# Altium PCB rtm-damp-dvb.PcbDoc (part 1 of 3)
Units mm, origin at the board's own origin, x right, y up, seen from the top; angles counter-clockwise.
Board outline 152.4 x 101.6 mm, 4 copper layers (Top Layer, GND, Vcc, Bottom Layer), stack 0.777 mm thick; 196 components, 95 nets, 559 pads, 90 vias.
Unrouted connection lines stored in the file: 129.
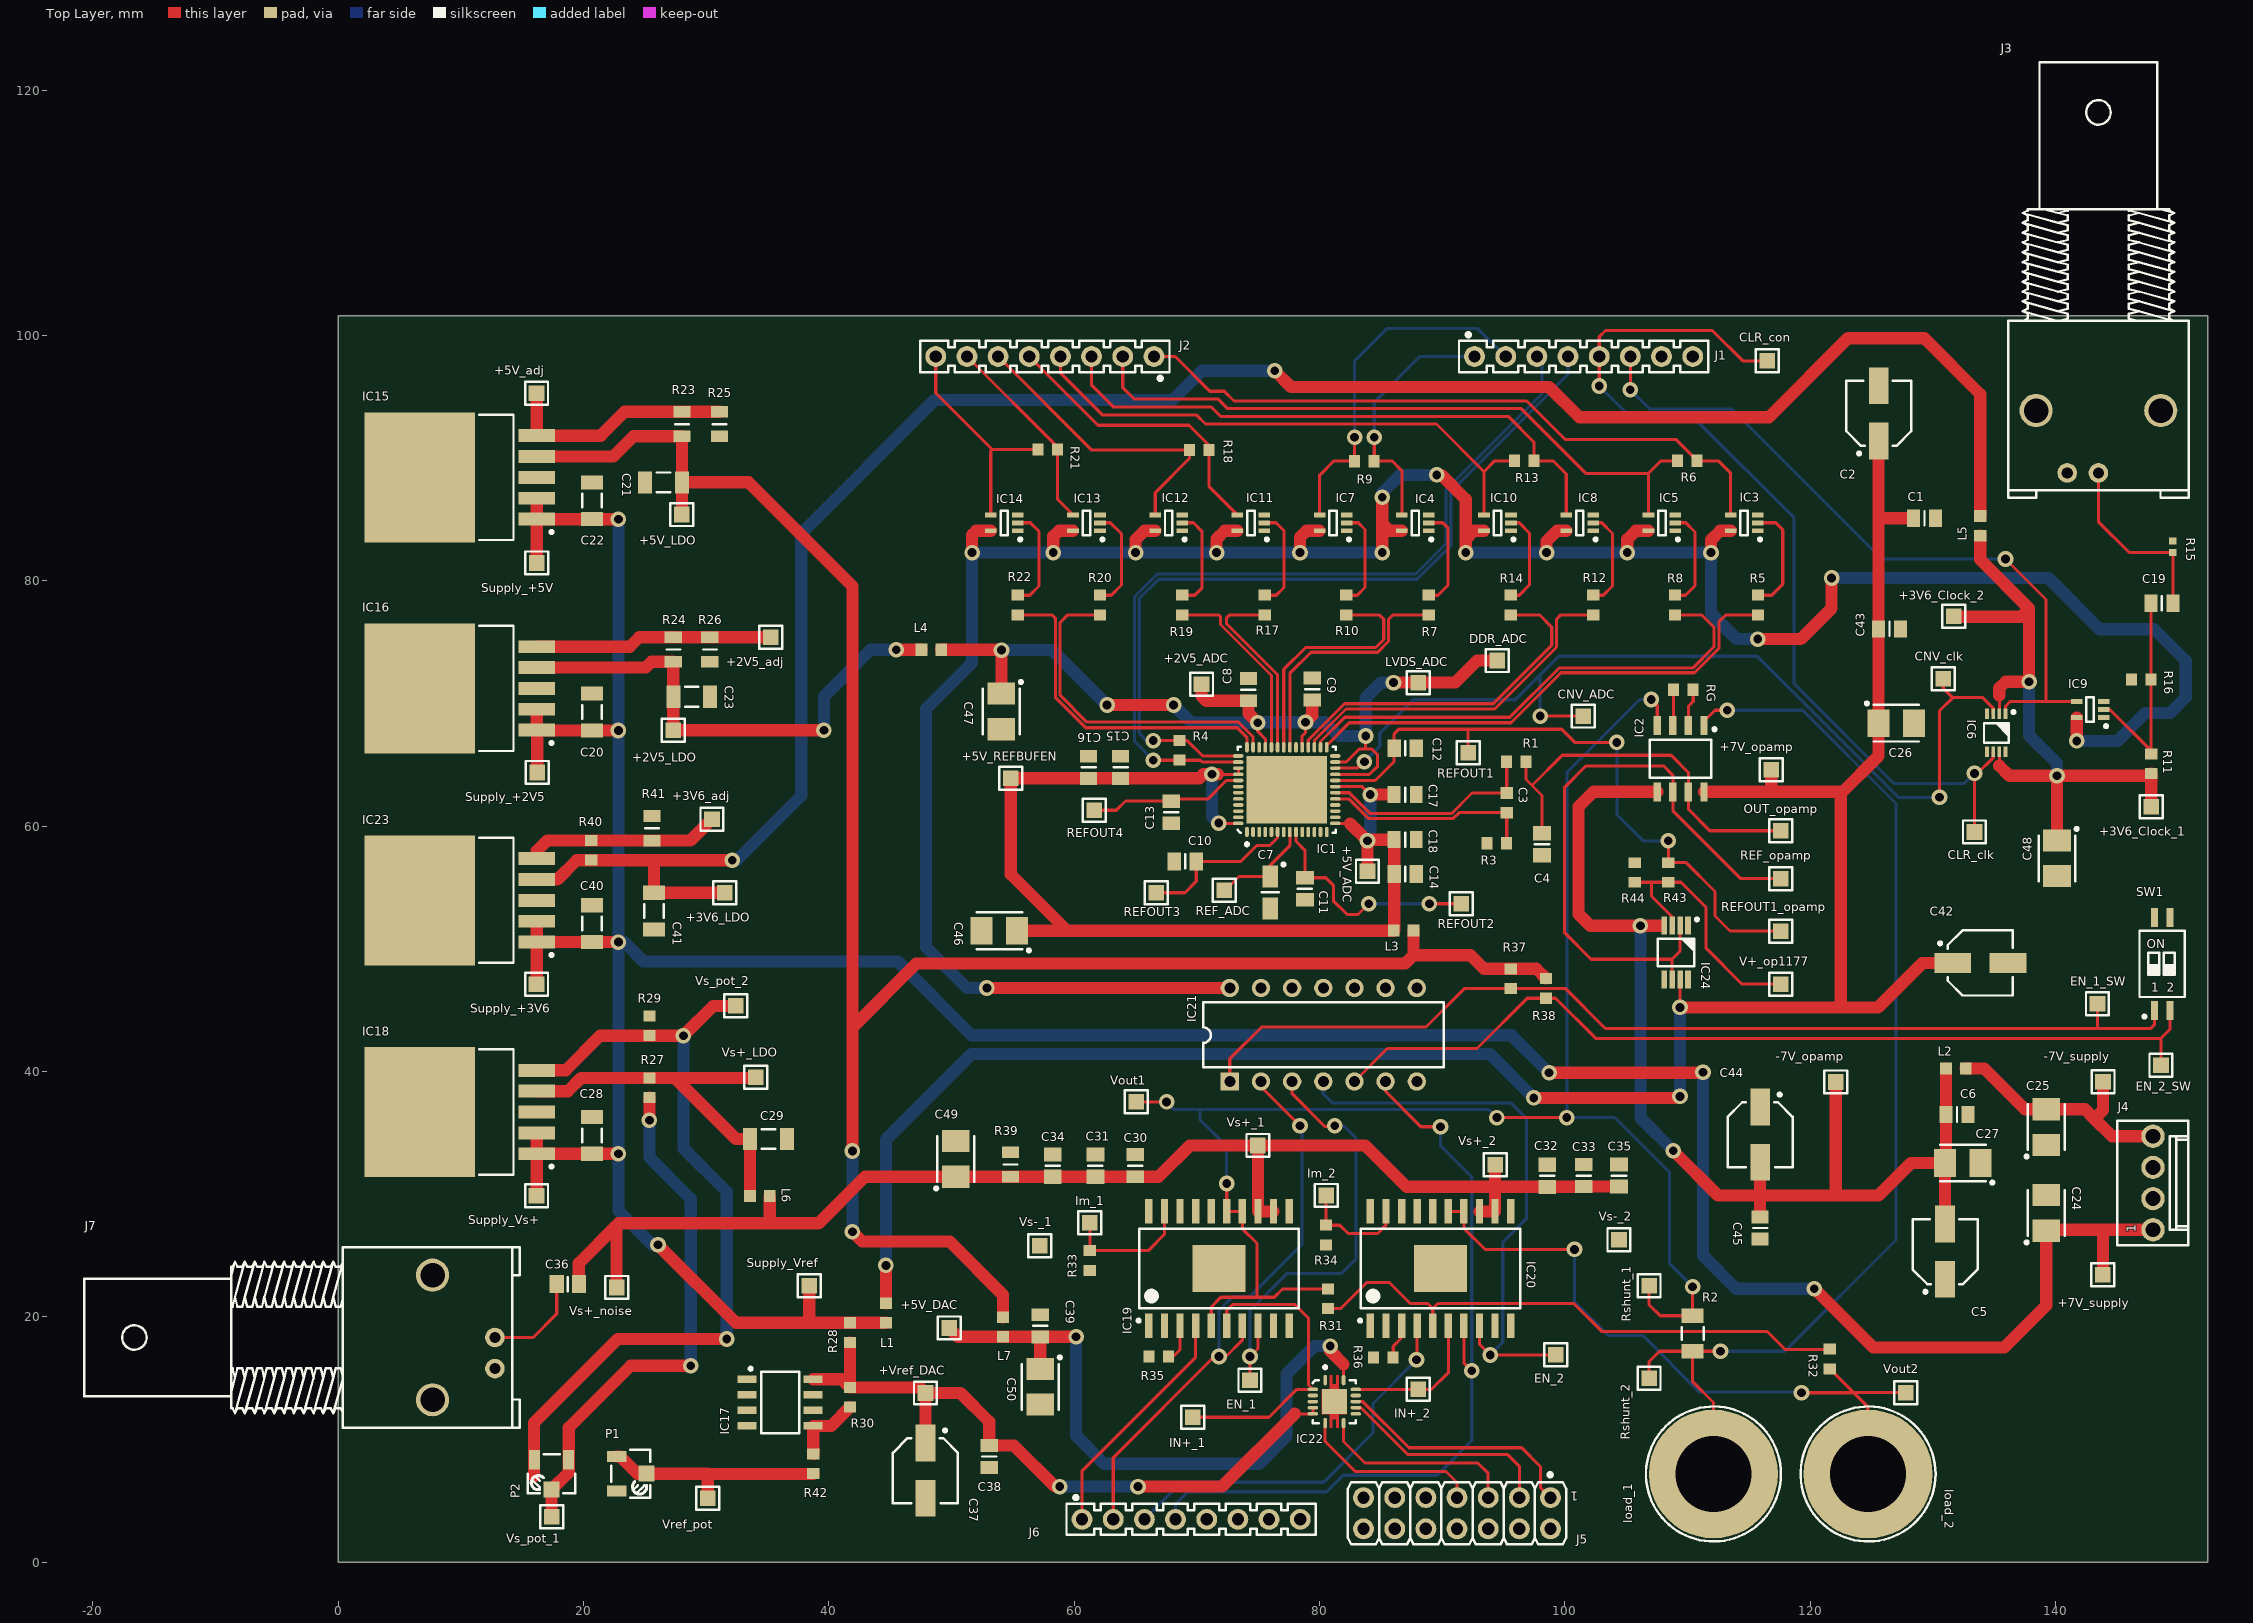
[diagram p0: Top Layer view]
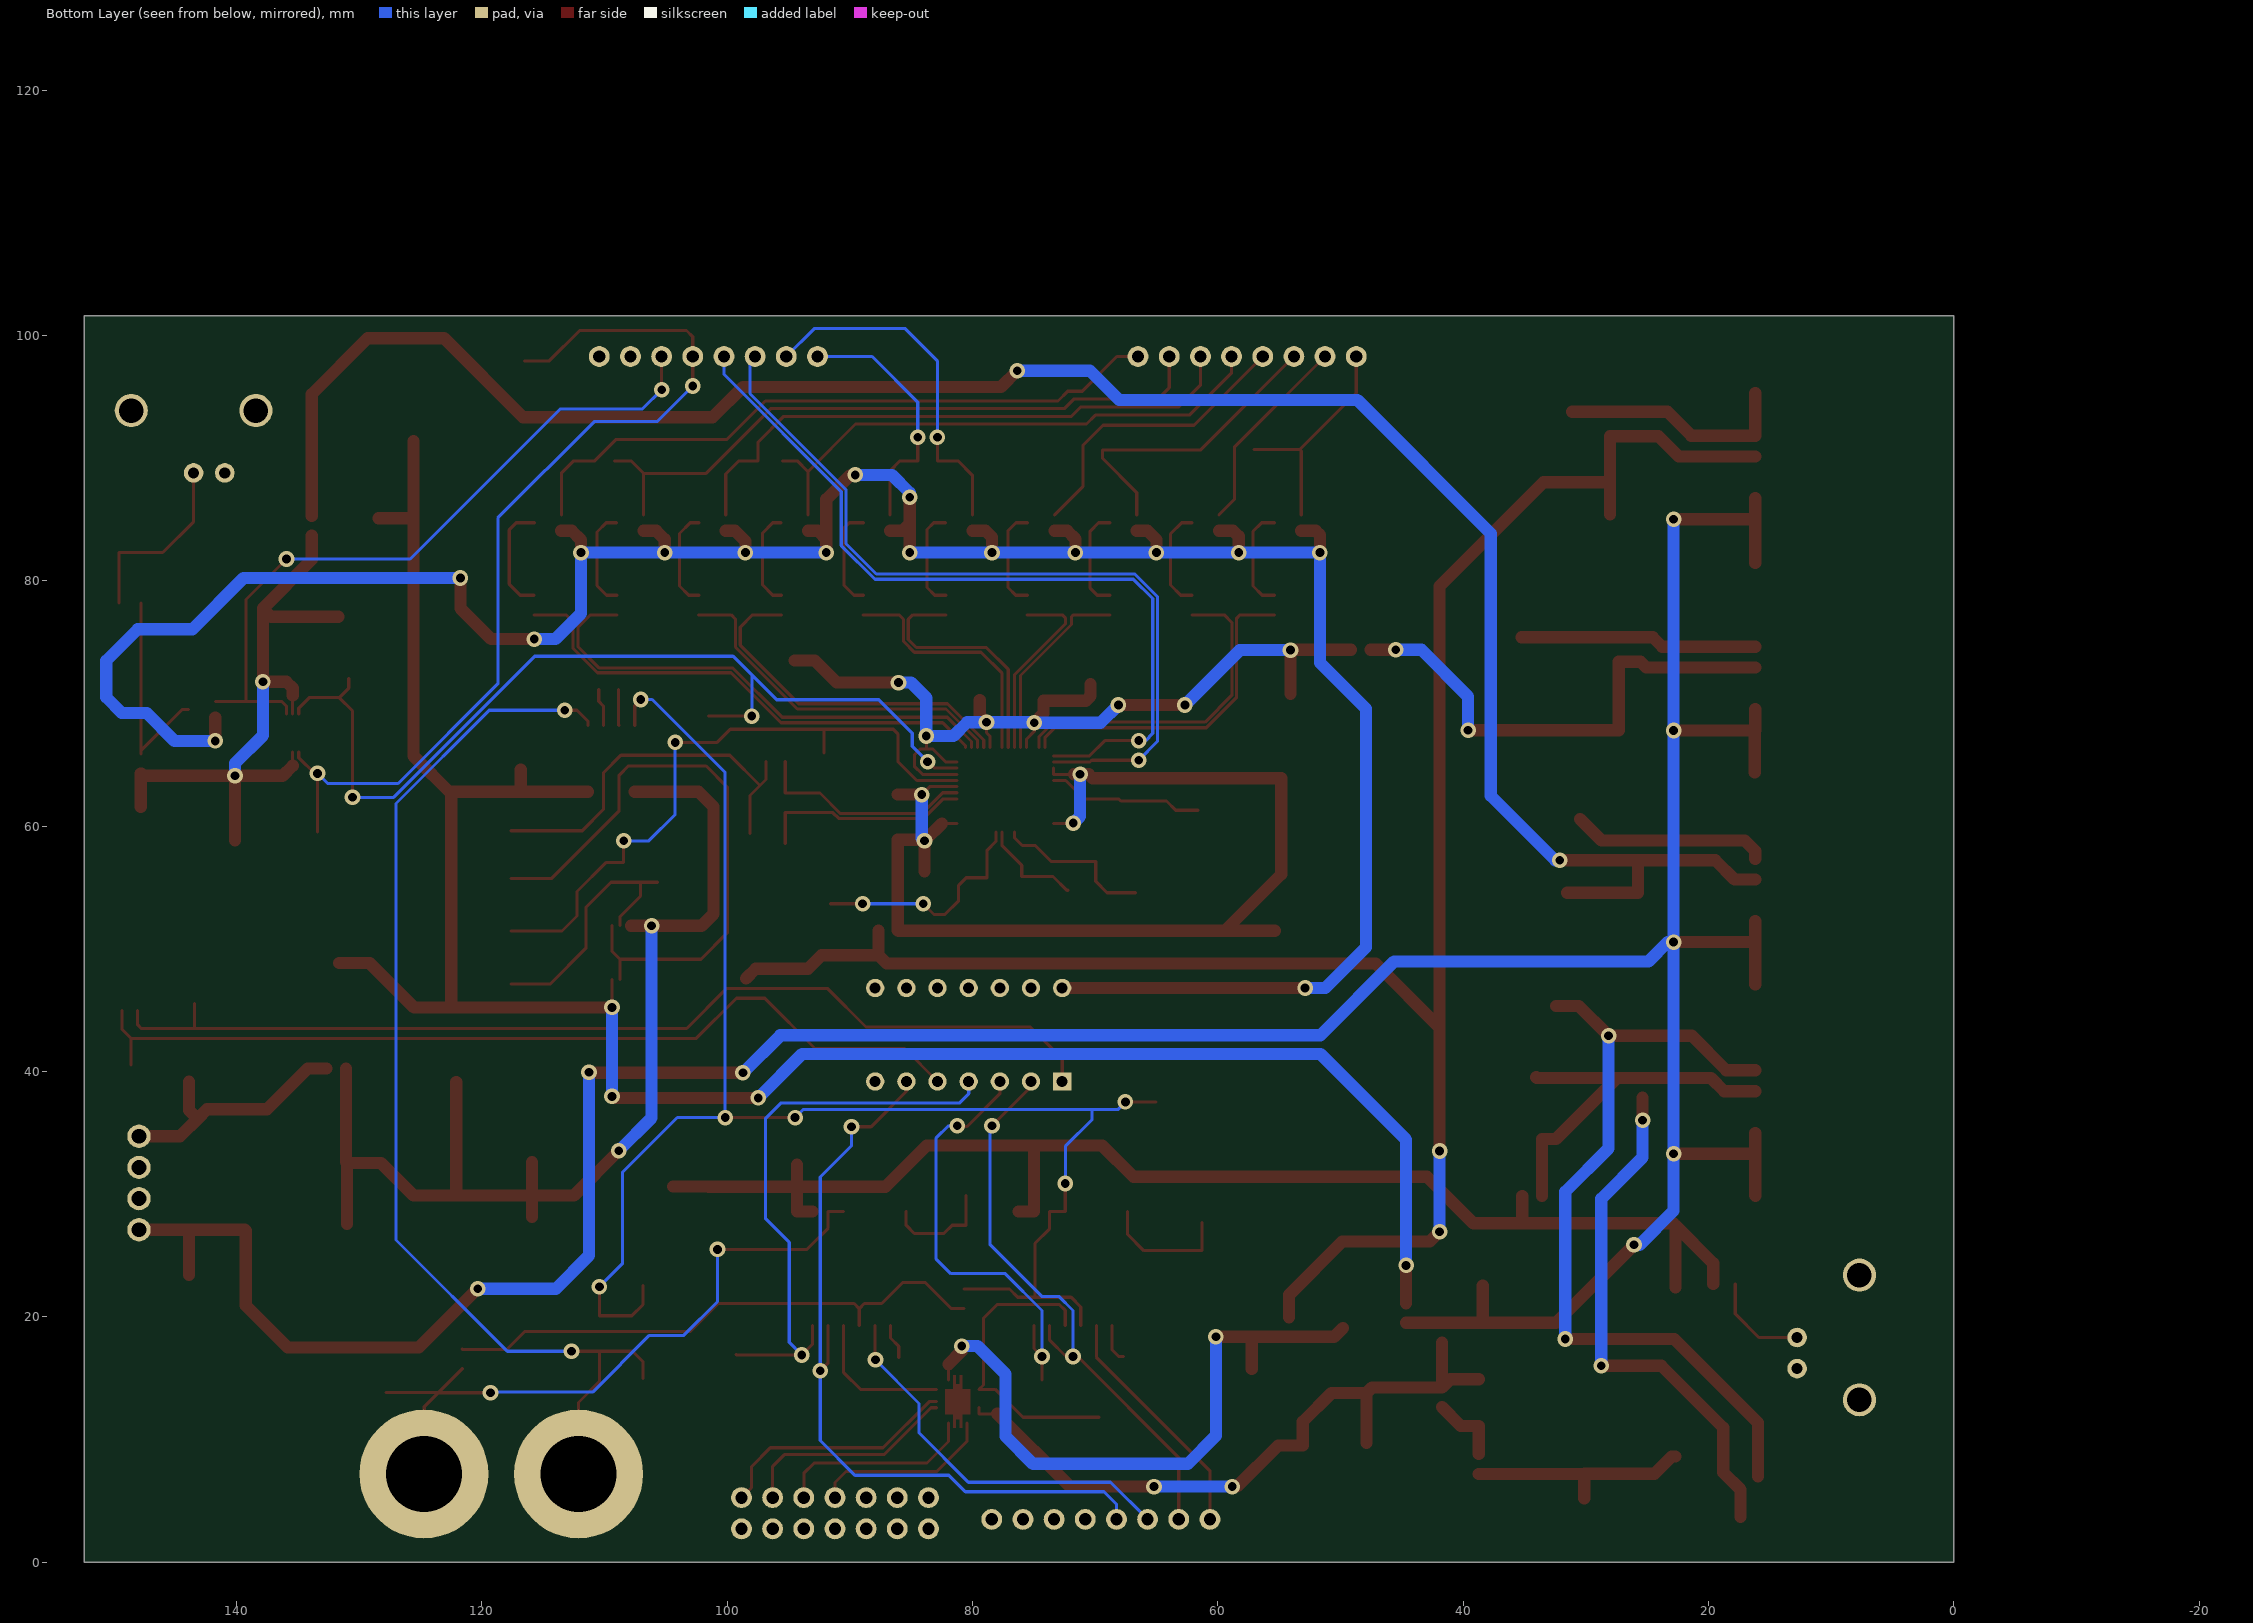
[diagram p1: Bottom Layer view, seen from below]
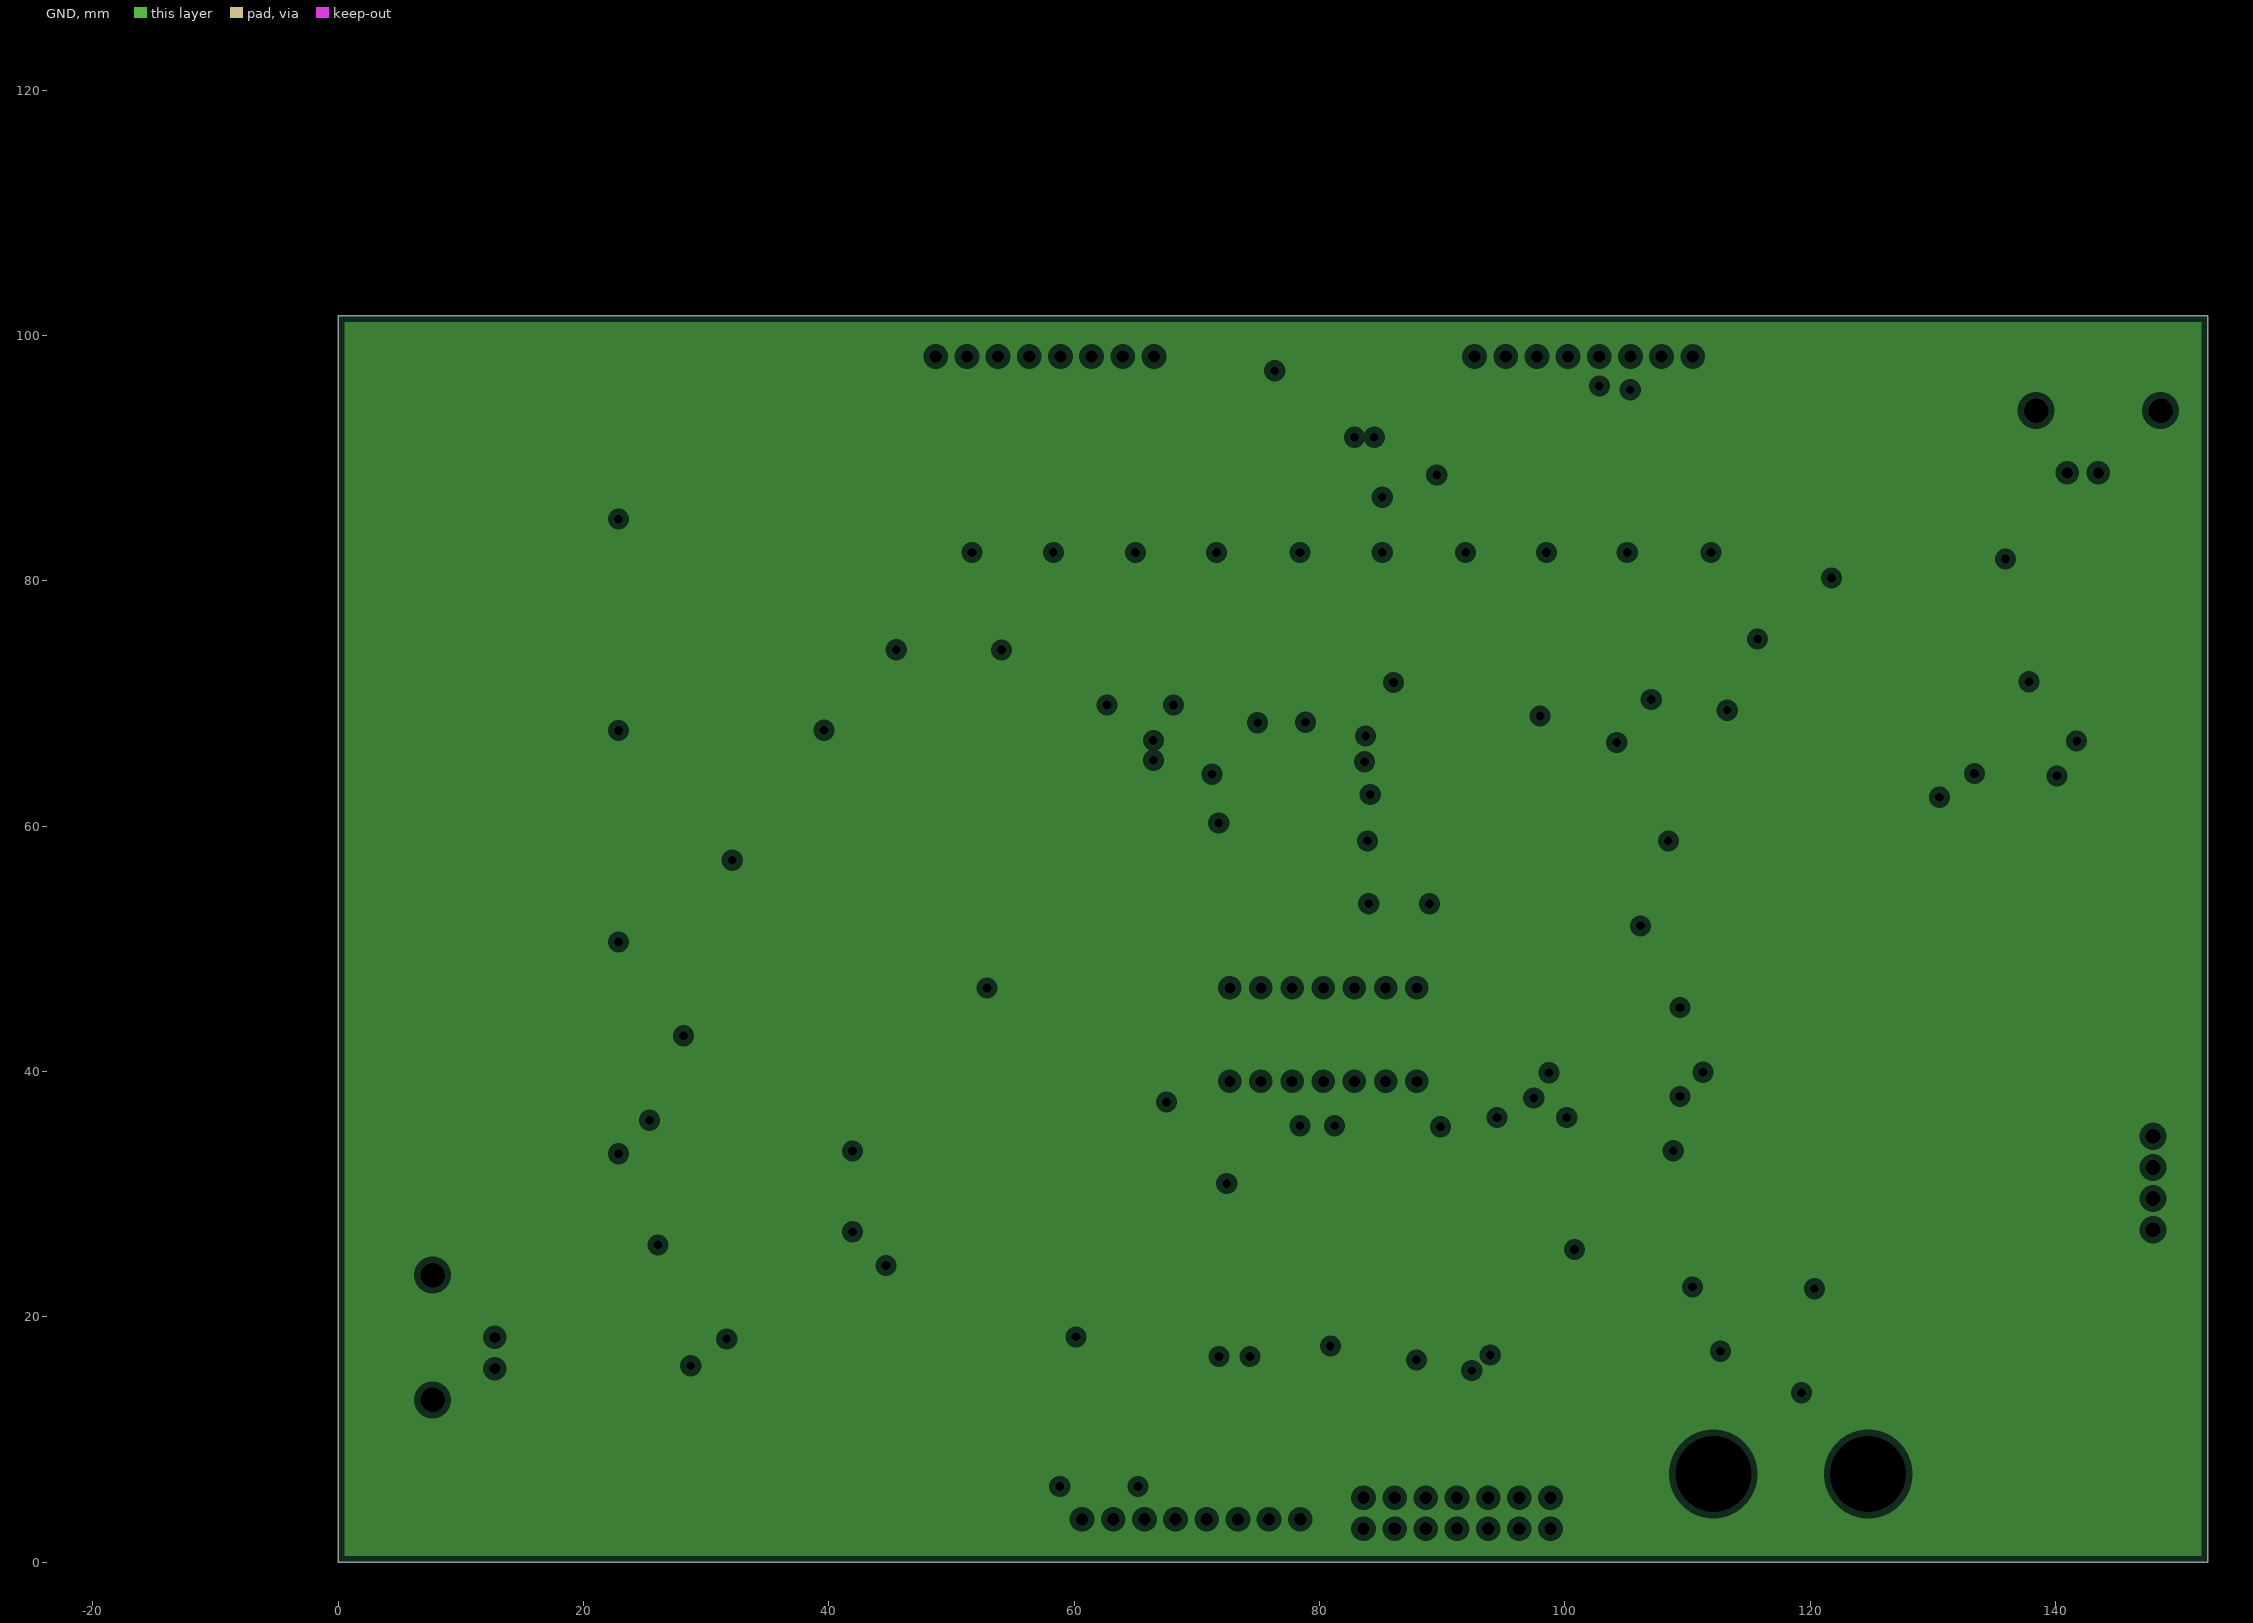
[diagram p2: GND, clearances drawn from the general rule]
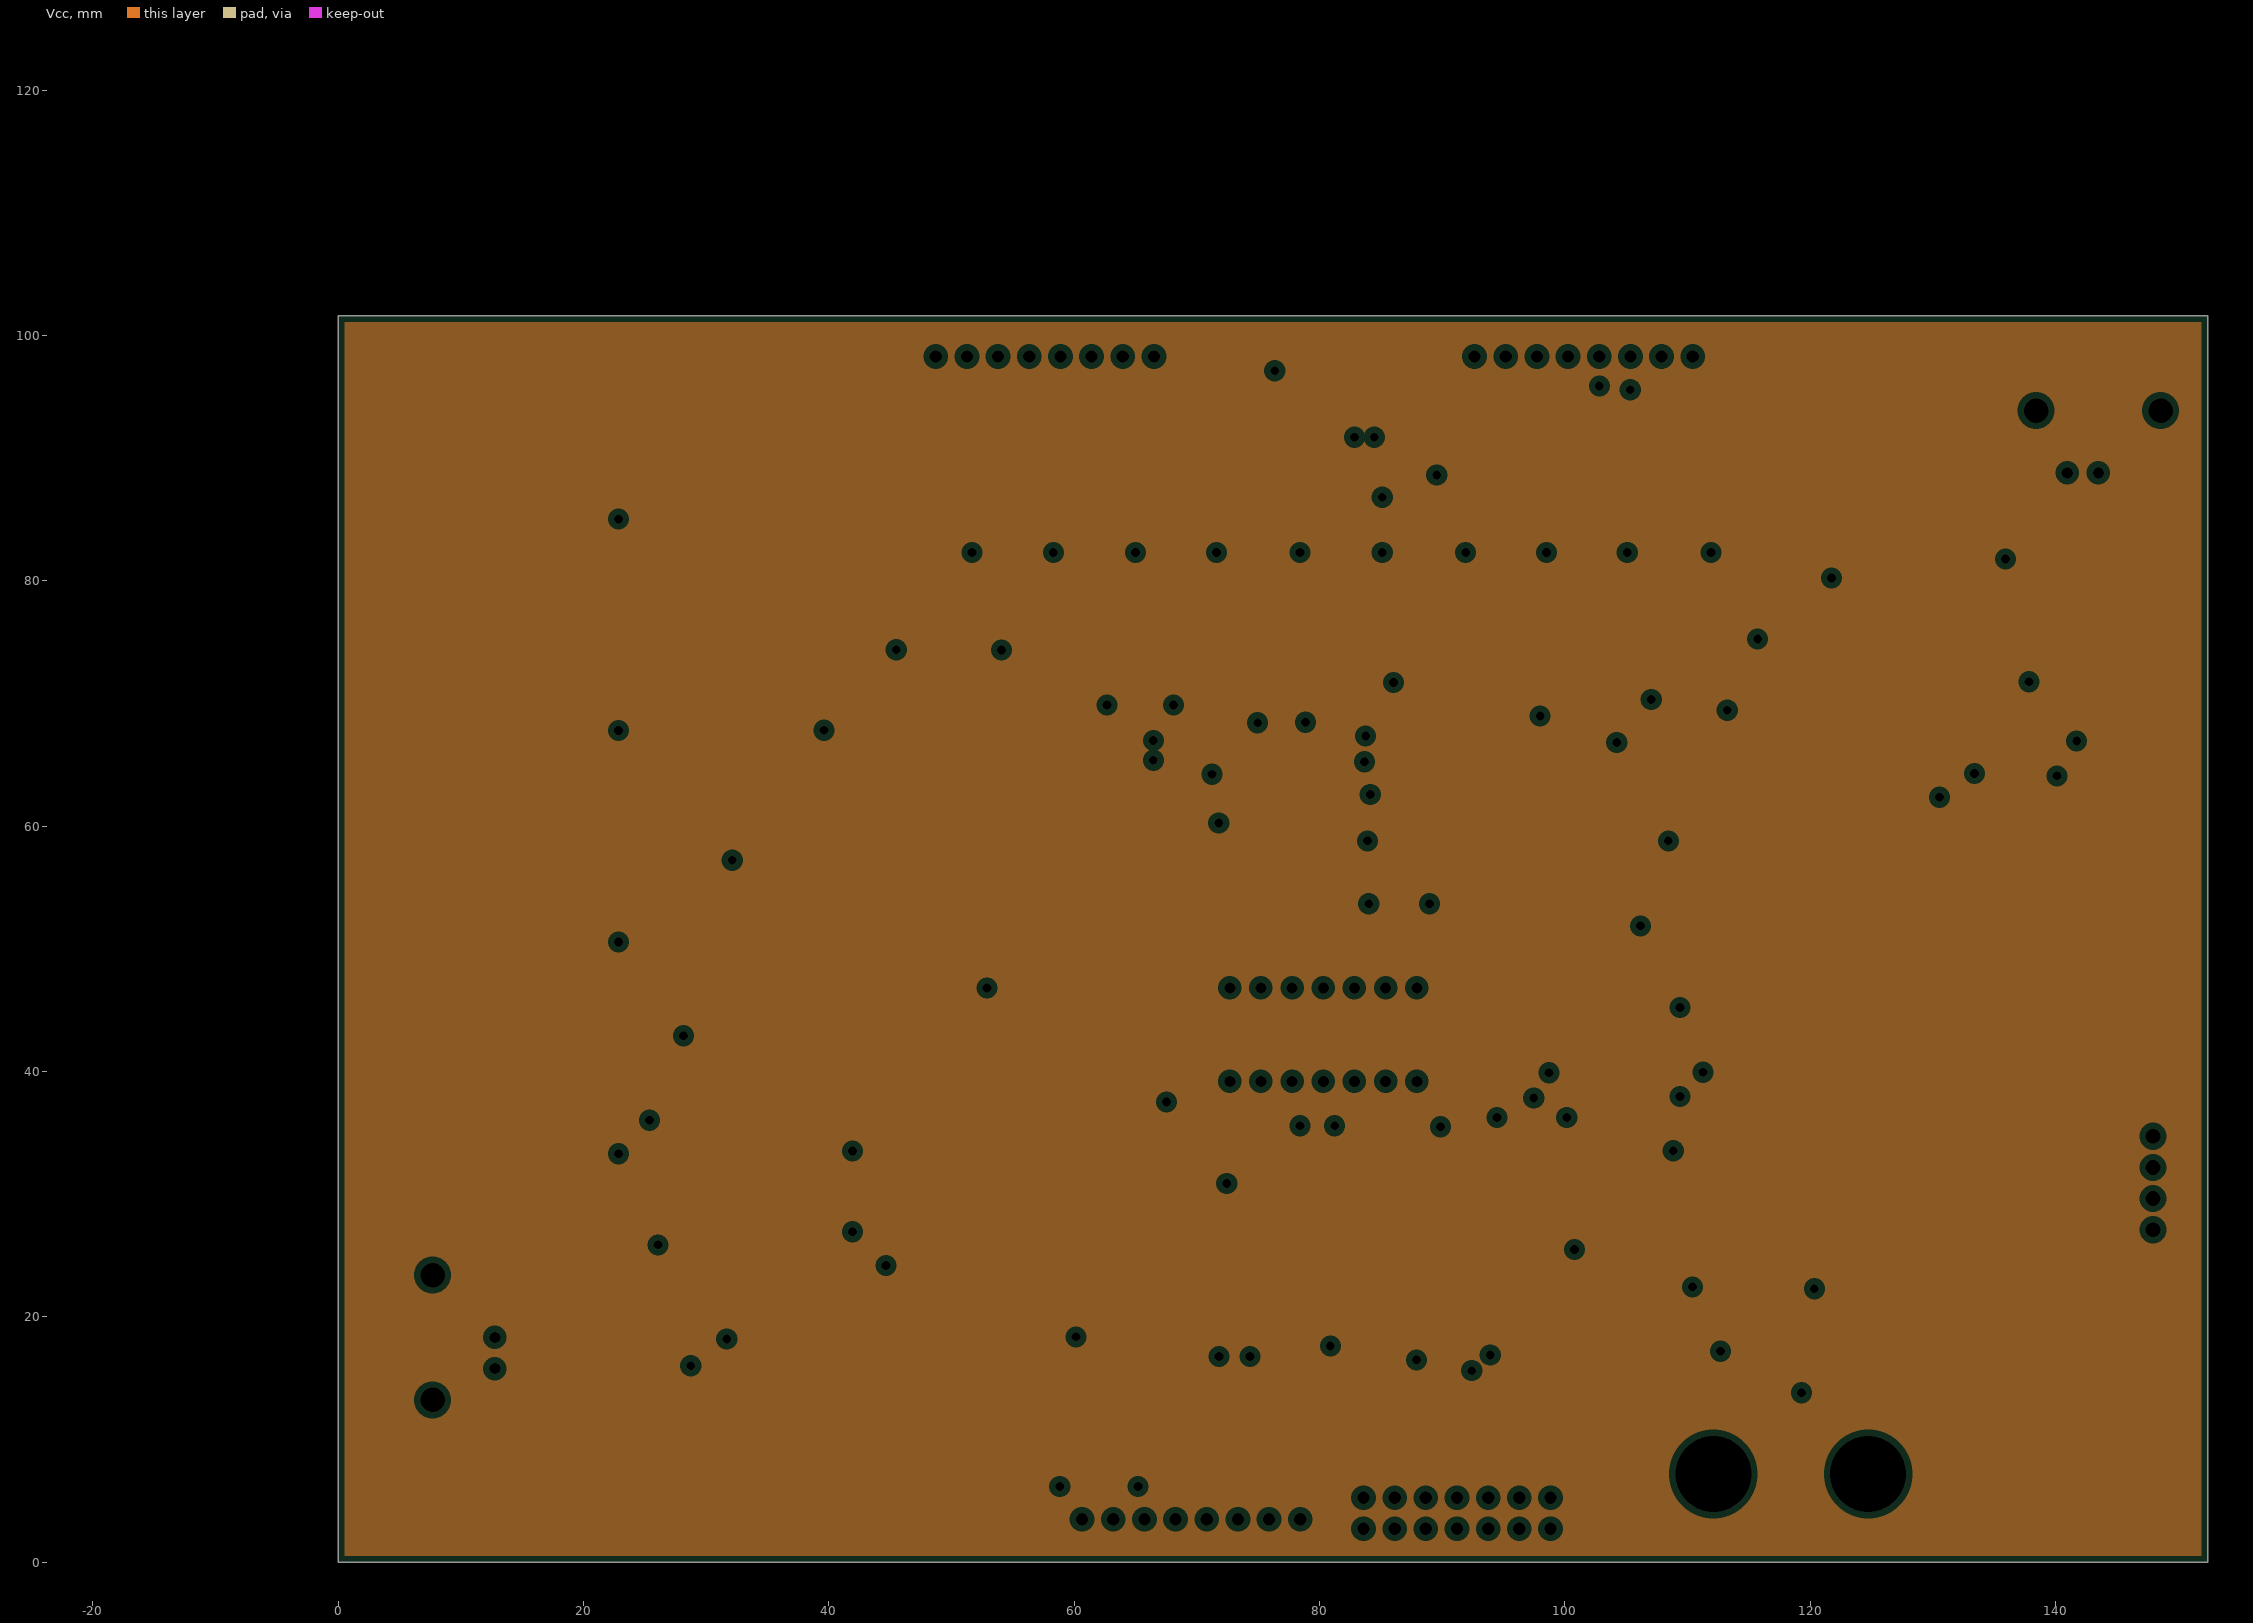
[diagram p3: Vcc, clearances drawn from the general rule]
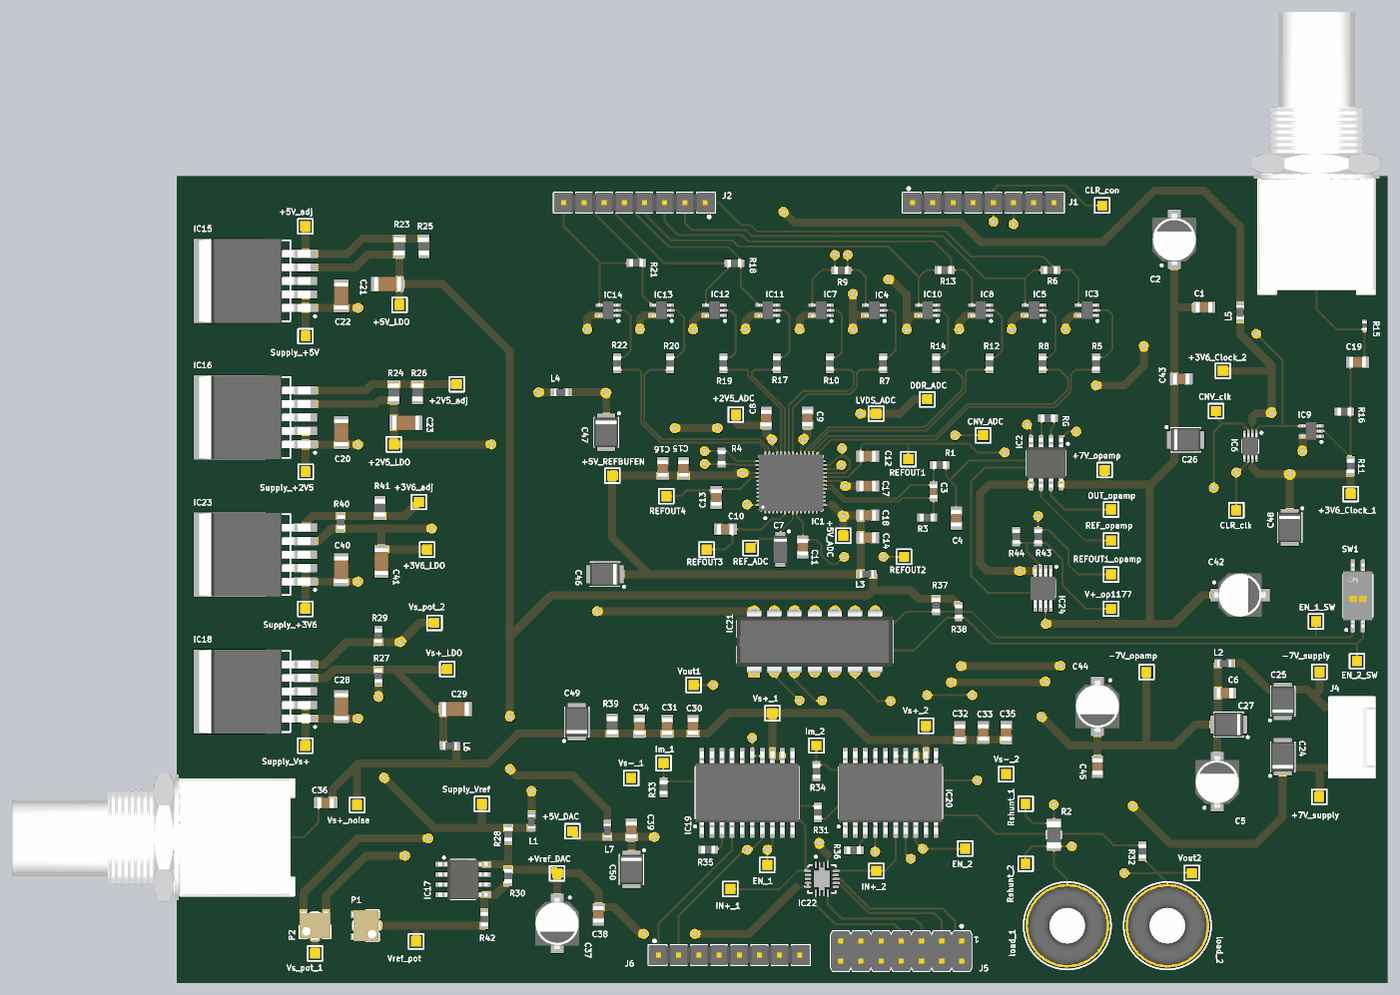
[diagram p5: 3D render of the assembled board from above, using the file's embedded part models]

## Layer stack, top to bottom
Top Solder: solder mask 0.01, Solder Resist, Dk 3.5
Top Layer: signal copper 0.035
Dielectric 1: core 0.254, Dk 4.2
GND: plane copper 0.036
Dielectric 2: prepreg 0.127, FR-4, Dk 4.2
Vcc: plane copper 0.036
Dielectric 4: core 0.254, Dk 4.2
Bottom Layer: signal copper 0.035
Bottom Solder: solder mask 0.01, Solder Resist, Dk 3.5

## Board outline
0,0 152.4,0 152.4,101.6 0,101.6

## Design rules (kind name [scope] priority, off if disabled: settings)
Clearance [All] p1: gap=0.153 ignorepadtopadclearanceinfootprint=FALSE except(0: Arc-Hole Track-Hole SMDPad-Hole THPad-Hole Via-Hole Fill-Hole Poly-Hole Region-Hole Text-Hole)
DiffPairsRouting [All] p1: maxlimit=0.4 minlimit=0.13 mostfreqgap=0.13 toplayer_minwidth=0.13 toplayer_maxwidth=0.254 toplayer_prefwidth=0.153 bottomlayer_minwidth=0.13 bottomlayer_maxwidth=0.254 bottomlayer_prefwidth=0.153 maxuncoupledlength=12.7
PlaneClearance [All] p1: clearance=0.508
PlaneConnect [All] p1: planeconnectstyle=Relief reliefexpansion=0.508 reliefentries=4 reliefconductorwidth=0.254 reliefairgap=0.254
PolygonConnect [All] p1: connectstyle=Relief reliefconductorwidth=0.254 reliefentries=4 polygonreliefangle="90 Angle" airgapwidth=0.254
RoutingVias [All] p1: holewidth=0.711 width=1.27 viastyle="Through Hole" minholewidth=0.711 minwidth=1.27 maxholewidth=0.711 maxwidth=1.27
SolderMaskExpansion [All] p1: expansion=0.102
Width [All] p1: maxlimit=3 minlimit=0.1 preferedwidth=0.254
27 further rules are at their usual default settings.

## Classes and differential pairs
component class rtm-damp-dvb-ADC-circuit: +2V5_ADC +5V_ADC +7V_opamp -7V_opamp C1 C2 C3 C4 C5 C6 C7 C8 C9 C10 C11 C12 C13 C14 C15 C16 C17 C18 C26 C27 C42 C43 C44 C45 C46 C47 CNV_ADC DDR_ADC IC1 IC2 IC24 L1 L2 L3 L4 LVDS_ADC OUT_opamp R1 R2 R3 R4 R43 R44 REF_ADC REF_opamp REFOUT1 REFOUT1_opamp REFOUT2 REFOUT3 REFOUT4 RG Rshunt_1 Rshunt_2 V+_op1177
component class rtm-damp-dvb-clock-and-supply: +2V5_adj +2V5_LDO +3V6_adj +3V6_Clock_1 +3V6_Clock_2 +3V6_LDO +5V_adj +5V_LDO +7V_supply -7V_supply C19 C20 C21 C22 C23 C24 C25 C28 C29 C40 C41 C48 CLR_clk CLR_con CNV_clk IC3 IC4 IC5 IC6 IC7 IC8 IC9 IC10 IC11 IC12 IC13 IC14 IC15 IC16 IC18 IC23 J1 J2 J3 J4 L5 P2 R5 R6 R7 R8 R9 R10 R11 R12 R13 R14 R15 R16 R17 R18 R19 R20 R21 R22 R23 R24 R25 R26 R27 R29 R40 R41 Supply_+2V5 Supply_+3V6 Supply_+5V Supply_Vs+ Vs+_LDO Vs_pot_1 Vs_pot_2
component class rtm-damp-dvb: +5V_DAC +Vref_DAC C30 C31 C32 C33 C34 C35 C36 C37 C38 C39 C49 C50 EN_1 EN_1_SW EN_2 EN_2_SW IC17 IC19 IC20 IC21 IC22 Im_1 Im_2 IN+_1 IN+_2 J5 J6 J7 L6 L7 load_1 load_2 P1 R28 R30 R31 R32 R33 R34 R35 R36 R37 R38 R39 R42 Supply_Vref SW1 Vout1 Vout2 Vref_pot Vs+_1 Vs+_2 Vs+_noise Vs-_1 Vs-_2
differential pair AIN1: +AIN1_P -AIN1_N
differential pair CLKOUT: +CLKOUT_P -CLKOUT_N
differential pair SCK: +SCK_P -SCK_N
differential pair SDOA: +SDOA_P -SDOA_N
differential pair SDOB: +SDOB_P -SDOB_N
differential pair SDOC: +SDOC_P -SDOC_N
differential pair SDOD: +SDOD_P -SDOD_N

## Components (designator, comment, footprint, x,y, rotation, side; value= is the part's Value field where it differs from the comment)
+2V5_ADC "Test Point" TPS127 70.375,71.575 r90 top
+2V5_adj "Test Point" TPS127 35.25,75.4 r90 top
+2V5_LDO "Test Point" TPS127 27.325,67.825 r90 top
+3V6_adj "Test Point" TPS127 30.475,60.575 r90 top
+3V6_Clock_1 "Test Point" TPS127 147.775,61.575 r90 top
+3V6_Clock_2 "Test Point" TPS127 131.675,77.1 r90 top
+3V6_LDO "Test Point" TPS127 31.525,54.575 r90 top
+5V_ADC "Test Point" TPS127 83.9,56.325 r90 top
+5V_adj "Test Point" TPS127 16.175,95.3 r90 top
+5V_DAC "Test Point" TPS127 49.8,19.1 r90 top
+5V_LDO "Test Point" TPS127 28.025,85.4 r90 top
+5V_REFBUFEN "Test Point" TPS127 54.825,63.9 r90 top
+7V_opamp "Test Point" TPS127 116.8,64.6 r90 top
+7V_supply "Test Point" TPS127 143.825,23.425 r90 top
+Vref_DAC "Test Point" TPS127 47.875,13.8 r90 top
-7V_opamp "Test Point" TPS127 122.075,39.15 r90 top
-7V_supply "Test Point" TPS127 143.85,39.175 r90 top
C1 "100nF" CAPC2012X135N 129.3,85.1 r0 top
C2 "10uF" CAPAE530X540N 125.575,93.65 r90 top
C3 "220pF" CAPC1608X87N 95.25,61.9 r90 top
C4 "47uF" CAPC2012X140N 98.125,58.525 r90 top
C5 "10uF" CAPAE530X540N 130.975,25.325 r90 top
C6 "100nF" CAPC2012X135N 131.95,36.5 r180 top
C7 "1uF" CAPMP3216X180N 75.975,54.6 r270 top
C8 "100nF" CAPC2012X135N 74.2,71.125 r270 top
C9 "100nF" CAPC2012X135N 79.4,71.175 r270 top
C10 "10uF" CAPC2012X95N 69.05,57.125 r0 top
C11 "10uF" CAPC2012X95N 78.8,54.9 r90 top
C12 "10uF" CAPC2012X95N 86.975,66.35 r180 top
C13 "10uF" CAPC2012X95N 67.9,61.15 r90 top
C14 "10uF" CAPC2012X95N 86.975,56.1 r180 top
C15 "100nF" CAPC2012X135N 63.775,64.8 r270 top
C16 "100nF" CAPC2012X135N 61.175,64.8 r270 top
C17 "100nF" CAPC2012X135N 86.975,62.575 r180 top
C18 "100nF" CAPC2012X135N 86.975,58.9 r180 top
C19 "100nF" CAPC2012X135N 148.65,78.175 r180 top
C20 "10uF" CAPC3216X180N 20.7,69.3 r270 top
C21 "10uF" CAPC3216X180N 26.525,88.025 r0 top
C22 "10uF" CAPC3216X180N 20.7,86.525 r270 top
C23 "10uF" CAPC3216X180N 28.825,70.55 r180 top
C24 "47uF" CAPMP3528X210N 139.225,28.475 r90 top
C25 "47uF" CAPMP3528X210N 139.225,35.475 r90 top
C26 "47uF" CAPMP3528X210N 127,68.4 r0 top
C27 "47uF" CAPMP3528X210N 132.425,32.55 r180 top
C28 "10uF" CAPC3216X180N 20.7,34.8 r270 top
C29 "10uF" CAPC3216X180N 35.075,34.5 r180 top
C30 "100nF" CAPC2012X135N 64.975,32.325 r90 top
C31 "47uF" CAPC2012X140N 61.725,32.325 r90 top
C32 "47uF" CAPC2012X140N 98.55,31.5 r90 top
C33 "100nF" CAPC2012X135N 101.525,31.525 r90 top
C34 "47uF" CAPC2012X140N 58.25,32.325 r270 top
C35 "47uF" CAPC2012X140N 104.4,31.525 r270 top
C36 "2.2uF" CAPC2012X140N 18.725,22.675 r180 top
C37 "10uF" CAPAE530X540N 47.875,7.475 r270 top
C38 "100nF" CAPC2012X135N 53.075,8.625 r90 top
C39 "100nF" CAPC2012X135N 57.225,19.275 r270 top
C40 "10uF" CAPC3216X180N 20.7,52.05 r270 top
C41 "10uF" CAPC3216X180N 25.75,53.075 r90 top
C42 "10uF" CAPAE530X540N 133.85,48.85 r0 top
C43 "100nF" CAPC2012X135N 126.45,76.075 r180 top
C44 "10uF" CAPAE530X540N 115.9,34.85 r270 top
C45 "100nF" CAPC2012X135N 115.9,27.25 r90 top
C46 "47uF" CAPMP3528X210N 53.9,51.475 r180 top
C47 "47uF" CAPMP3528X210N 54.05,69.35 r270 top
C48 "47uF" CAPMP3528X210N 140.1,57.375 r270 top
C49 "47uF" CAPMP3528X210N 50.35,32.875 r90 top
C50 "47uF" CAPMP3528X210N 57.225,14.3 r270 top
CLR_clk "Test Point" TPS127 133.375,59.525 r90 top
CLR_con "Test Point" TPS127 116.5,97.925 r90 top
CNV_ADC "Test Point" TPS127 101.5,68.975 r90 top
CNV_clk "Test Point" TPS127 130.825,72.025 r90 top
DDR_ADC "Test Point" TPS127 94.475,73.5 r90 top
EN_1 "Test Point" TPS127 74.325,14.85 r90 top
EN_1_SW "Test Point" TPS127 143.4,45.525 r90 top
EN_2 "Test Point" TPS127 99.25,16.925 r90 top
EN_2_SW "Test Point" TPS127 148.575,40.525 r90 top
IC1 "LTC2320IUKG" QFN50P700X800X80-53N-R655X550 77.325,62.975 r90 top
IC2 "AD8429BRZ" SOIC127P600X175-8N 109.425,65.5 r270 top
IC3 "NC7SVU04P5X" SOT65P210X110-5N 114.6,84.725 r180 top
IC4 "NC7SVU04P5X" SOT65P210X110-5N 87.8,84.725 r180 top
IC5 "NC7SVU04P5X" SOT65P210X110-5N 107.9,84.725 r180 top
IC6 "NC7SV74K8X" SOP50P310X90-8N 135.15,67.6 r270 top
IC7 "NC7SVU04P5X" SOT65P210X110-5N 81.1,84.725 r180 top
IC8 "NC7SVU04P5X" SOT65P210X110-5N 101.2,84.725 r180 top
IC9 "NC7SVU04P5X" SOT65P210X110-5N 142.8,69.5 r180 top
IC10 "NC7SVU04P5X" SOT65P210X110-5N 94.5,84.725 r180 top
IC11 "NC7SVU04P5X" SOT65P210X110-5N 74.4,84.725 r180 top
IC12 "NC7SVU04P5X" SOT65P210X110-5N 67.7,84.725 r180 top
IC13 "NC7SVU04P5X" SOT65P210X110-5N 61,84.725 r180 top
IC14 "NC7SVU04P5X" SOT65P210X110-5N 54.3,84.725 r180 top
IC15 "LT1764AEQ#PBF" TO170P1394X457-6N-R900X1060 9.9,88.425 r180 top
IC16 "LT1764AEQ#PBF" TO170P1394X457-6N-R900X1060 9.9,71.225 r180 top
IC17 "LM385BM/NOPB" SOIC127P600X175-8N 36.025,13.025 r0 top
IC18 "LT1764AEQ#PBF" TO170P1394X457-6N-R900X1060 9.9,36.7 r180 top
IC19 "OPA569AIDWP" SOIC127P1030X265-21N-R381X432 71.8,23.95 r90 top
IC20 "OPA569AIDWP" SOIC127P1030X265-21N-R381X432 89.855,23.95 r90 top
IC21 "HEF4081BP" DIP14-300 80.3,43 r90 top
IC22 "DAC8831ICRGYT" "TEXAS_RGY (S-PVQFN–N14)" 81.2,13.1 r0 top
IC23 "LT1764AEQ#PBF" TO170P1394X457-6N-R900X1060 9.9,53.95 r180 top
IC24 "OP1177ARMZ" SOP65P490X110-8N 109.05,49.7 r270 top
Im_1 "Test Point" TPS127 61.275,27.675 r90 top
Im_2 "Test Point" TPS127 80.525,29.9 r90 top
IN+_1 "Test Point" TPS127 69.675,11.825 r90 top
IN+_2 "Test Point" TPS127 88.05,14.1 r90 top
J1 "Header 8" SAMTEC_TSW-108-07-L-S-LL 92.63,98.275 r0 top
J2 "Header 8" SAMTEC_TSW-108-07-L-S-LL 66.495,98.275 r180 top
J3 "BNC" TYCO_1-1337542-0_a 143.475,94.275 r90 top
J4 "KK®" MOLEX_22-27-2041 147.925,30.915 r90 top
J5 "Header 14" SAMTEC_MTLW-107-07-L-D-250 91.2,4 r180 top
J6 "Header 8" SAMTEC_TSW-108-07-L-S-LL 60.64,3.5 r0 top
J7 "BNC" TYCO_1-1337542-0_a 7.3,18.325 r180 top
L1 "1K@100MHz" INDC1608X95N 44.65,20.325 r90 top
L2 "1K@100MHz" INDC1608X95N 131.85,40.25 r180 top
L3 "1K@100MHz" INDC1608X95N 86.85,51.5 r180 top
L4 "1K@100MHz" INDC1608X95N 48.35,74.375 r0 top
L5 "1K@100MHz" INDC1608X95N 133.85,84.475 r270 top
L6 "600R@100MHz" INDC1608X95N 34.375,29.85 r0 top
L7 "1K@100MHz" INDC1608X95N 54.2,19.175 r270 top
load_1 "Banana" "SKS-HIRSCHMANN_930 176-100" 112.1,7.2 r0 top
load_2 "Banana" "SKS-HIRSCHMANN_930 176-100" 124.7,7.2 r0 top
LVDS_ADC "Test Point" TPS127 88.025,71.7 r90 top
OUT_opamp "Test Point" TPS127 117.6,59.625 r90 top
P1 "100k" TRIM_BOURNS_3223W 23.85,7.225 r270 top
P2 "2k" TRIM_BOURNS_3223W 17.4,7.215 r180 top
R1 "25R5" RESC1608X55N 96.025,65.25 r180 top
R2 "0R1" RESC3216X65N 110.4,18.65 r270 top
R3 "25R5" RESC1608X55N 94.45,58.6 r0 top
R4 "100" RESC1608X55N 68.575,66.175 r270 top
R5 "10" RESC1608X55N 115.725,78.025 r270 top
R6 "100" RESC1608X55N 109.975,89.775 r180 top
R7 "10" RESC1608X55N 88.9,78.025 r270 top
R8 "10" RESC1608X55N 108.975,78.025 r270 top
R9 "100" RESC1608X55N 83.65,89.75 r0 top
R10 "10" RESC1608X55N 82.175,78.025 r270 top
R11 "1k" RESC1608X55N 147.775,65.1 r270 top
R12 "10" RESC1608X55N 102.3,78.025 r270 top
R13 "100" RESC1608X55N 96.675,89.775 r180 top
R14 "10" RESC1608X55N 95.575,78.025 r270 top
R15 "50" RESC1005X35N 149.525,82.775 r270 top
R16 "1k" RESC1608X55N 146.975,71.95 r0 top
R17 "10" RESC1608X55N 75.525,78.025 r270 top
R18 "100" RESC1608X55N 70.2,90.65 r180 top
R19 "10" RESC1608X55N 68.8,78.025 r270 top
R20 "10" RESC1608X55N 62.1,78.025 r270 top
R21 "100" RESC1608X55N 57.85,90.7 r180 top
R22 "10" RESC1608X55N 55.4,78.025 r270 top
R23 "4k75" RESC2012X60N 28.025,92.775 r270 top
R24 "1k6" RESC2012X60N 27.325,74.4 r270 top
R25 "1k5" RESC2012X60N 31.1,92.775 r90 top
R26 "1k5" RESC2012X60N 30.3,74.4 r90 top
R27 "2k4" RESC1608X55N 25.375,38.675 r90 top
R28 "66k5" RESC1608X55N 41.725,18.725 r90 top
R29 "1k6" RESC1608X55N 25.375,43.725 r270 top
R30 "140k" RESC1608X55N 41.725,13.45 r90 top
R31 "1k" RESC1608X55N 80.675,21.475 r270 top
R32 "1k" RESC1608X55N 121.575,16.575 r90 top
R33 "1k" RESC1608X55N 61.275,24.6 r270 top
R34 "1k" RESC1608X55N 80.525,26.675 r90 top
R35 "7k68" RESC1608X55N 66.9,16.775 r180 top
R36 "7k68" RESC1608X55N 85.2,16.7 r0 top
R37 "560k" RESC1608X55N 95.575,47.575 r270 top
R38 "560k" RESC1608X55N 98.45,46.775 r270 top
R39 "75" RESC2012X60N 54.8,32.425 r270 top
R40 "3k" RESC1608X55N 20.625,58.025 r270 top
R41 "1k5" RESC2012X60N 25.575,59.825 r270 top
R42 "200k" RESC1608X55N 38.725,8.025 r90 top
R43 "1k" RESC1608X64N 108.425,56.225 r90 top
R44 "1k" RESC1608X64N 105.675,56.225 r270 top
REF_ADC "Test Point" TPS127 72.225,54.775 r90 top
REF_opamp "Test Point" TPS127 117.6,55.725 r90 top
REFOUT1 "Test Point" TPS127 92.1,65.975 r90 top
REFOUT1_opamp "Test Point" TPS127 117.6,51.45 r90 top
REFOUT2 "Test Point" TPS127 91.55,53.675 r90 top
REFOUT3 "Test Point" TPS127 66.7,54.575 r90 top
REFOUT4 "Test Point" TPS127 61.625,61.3 r90 top
RG "0" RESC1608X55N 109.65,71.125 r0 top
Rshunt_1 "Test Point" TPS127 106.85,22.55 r90 top
Rshunt_2 "Test Point" TPS127 106.85,15 r180 top
Supply_+2V5 "Test Point" TPS127 16.225,64.375 r90 top
Supply_+3V6 "Test Point" TPS127 16.175,47.1 r90 top
Supply_+5V "Test Point" TPS127 16.2,81.45 r90 top
Supply_Vref "Test Point" TPS127 38.4,22.55 r90 top
Supply_Vs+ "Test Point" TPS127 16.175,29.875 r90 top
SW1 "Switch" SW_TYCO_1571983-1 148.675,48.775 r90 top
V+_op1177 "Test Point" TPS127 117.6,47.125 r90 top
Vout1 "Test Point" TPS127 65.05,37.525 r90 top
Vout2 "Test Point" TPS127 127.775,13.825 r90 top
Vref_pot "Test Point" TPS127 30.125,5.225 r90 top
Vs+_1 "Test Point" TPS127 74.975,33.975 r90 top
Vs+_2 "Test Point" TPS127 94.3,32.4 r90 top
Vs+_LDO "Test Point" TPS127 34.05,39.525 r90 top
Vs+_noise "Test Point" TPS127 22.7,22.4 r90 top
Vs-_1 "Test Point" TPS127 57.2,25.8 r90 top
Vs-_2 "Test Point" TPS127 104.4,26.3 r90 top
Vs_pot_1 "Test Point" TPS127 17.4,3.7 r90 top
Vs_pot_2 "Test Point" TPS127 32.425,45.35 r90 top

## Footprints (in the part's own frame and the unit in brackets; to place one, negate y for a bottom-side part, rotate by r counter-clockwise, add the part's x,y. Pads: shape width x height; smd on the part's side, far side on the other; paste and mask are expansions set on the pad)
CAPAE530X540N [mm] "Capacitor, Aluminium Electrolytric, 5.3mm L X 5.3mm W X 5.4mm H, IPC Medium Density"
  rect 3x1.6 smd: 1(-2.25,0) 2(2.25,0)
  silkscreen extent -3.4,-2.65 2.65,2.65, body extent -3.25,-2.75 3.25,2.75, height 5.7
CAPC1608X87N [mm] "Chip Capacitor, Body 1.6x0.8mm IPC Medium Density"
  rect 0.95x1 smd: 1(-0.8,0) 2(0.8,0)
  body extent -0.87,-0.47 0.88,0.48, height 0.87
CAPC2012X95N [mm] "Chip Capacitor, Body 2.0x1.25mm, IPC Medium Density"
  rect 1.1x1.45 smd: 1(-0.9,0) 2(0.9,0)
  silkscreen extent 0,-0.58 0,0.58, body extent -1.05,-0.67 1.05,0.68, height 0.95
CAPC2012X135N [mm] "Chip Capacitor, Body 2.0x1.25mm, IPC Medium Density"
  rect 1.05x1.4 smd: 1(-0.9,0) 2(0.9,0)
  silkscreen extent 0,-0.58 0,0.58, body extent -1.05,-0.67 1.05,0.68, height 1.25
CAPC2012X140N [mm] "Chip Capacitor, Body 2.0x1.25mm, IPC Medium Density"
  rect 1.15x1.45 smd: 1(-0.9,0) 2(0.9,0)
  silkscreen extent 0,-0.58 0,0.58, body extent -1.05,-0.67 1.05,0.68, height 1.3
CAPC3216X180N [mm] "Chip Capacitor, Body 3.2x1.6mm, IPC Medium Density"
  rect 1.15x1.8 smd: 1(-1.5,0) 2(1.5,0)
  silkscreen extent -0.55,-0.8 0.55,0.8, body extent -1.7,-0.9 1.7,0.9, height 1.8
CAPMP3216X180N [mm] "Capacitor, Polarized, Molded  Body 3.2x1.6mm, IPC Medium Density"
  rect 1.8x1.25 smd: 1(-1.3,0) 2(1.3,0)
  silkscreen extent -2.4,-0.7 0,1.2, body extent -1.7,-0.9 1.7,0.9, height 1.6
CAPMP3528X210N [mm] "Capacitor, Polarized, Molded  Body 3.5x2.8mm, IPC Medium Density"
  rect 1.8x2.25 smd: 1(-1.45,0) 2(1.45,0)
  silkscreen extent -2.52,-1.5 1.85,1.72, body extent -1.85,-1.5 1.85,1.5, height 2.1
DIP14-300 [mm] "DIP 14 Leads, Row Spacing 7.62 mm; Pitch 2.54 mm"
  rect 1.5x1.5 hole 0.9: 1(-3.81,7.62)
  round 1.5 hole 0.9: 2(-3.81,5.08) 3(-3.81,2.54) 4(-3.81,0) 5(-3.81,-2.54) 6(-3.81,-5.08) 7(-3.81,-7.62) 8(3.81,-7.62) 9(3.81,-5.08) 10(3.81,-2.54) 11(3.81,0) 12(3.81,2.54) 13(3.81,5.08) 14(3.81,7.62)
  silkscreen extent -2.65,-9.8 2.65,9.8, body extent -3.93,-9.84 3.94,9.85, height 5.33
INDC1608X95N [mm] "Chip Inductor, 2-Leads, EIA 0603, Metric 1608, Body 1.6x0.8mm, IPC Medium Density"
  rect 0.95x1 smd: 1(-0.8,0) 2(0.8,0)
  body extent -0.87,-0.47 0.88,0.48, height 0.95
MOLEX_22-27-2041 [mm] "2.54mm (.100\") Pitch KK® Header, Single Row, Vertical, 4 Circuits"
  round 1.9 hole 1.2: 1(-3.81,0) 2(-1.27,0) 3(1.27,0) 4(3.81,0)
  silkscreen extent -5.08,-2.88 5.08,2.92, body extent -5.08,-2.88 5.08,2.92, height 11.7
QFN50P700X800X80-53N-R655X550 [mm] "QFP, 0.50mm pitch, square; 12 pin X 14 pin, 7.00mm X 8.00mm, IPC Medium Density"
  oval 0.85x0.3 smd: 1(-3.45,3.25) 2(-3.45,2.75) 3(-3.45,2.25) 4(-3.45,1.75) 5(-3.45,1.25) 6(-3.45,0.75) 7(-3.45,0.25) 8(-3.45,-0.25) 9(-3.45,-0.75) 10(-3.45,-1.25) 11(-3.45,-1.75) 12(-3.45,-2.25) 13(-3.45,-2.75) 14(-3.45,-3.25) 27(3.45,-3.25) 28(3.45,-2.75) 29(3.45,-2.25) 30(3.45,-1.75) 31(3.45,-1.25) 32(3.45,-0.75) 33(3.45,-0.25) 34(3.45,0.25) 35(3.45,0.75) 36(3.45,1.25) 37(3.45,1.75) 38(3.45,2.25) 39(3.45,2.75) 40(3.45,3.25)
  oval 0.3x0.85 smd: 15(-2.75,-3.95) 16(-2.25,-3.95) 17(-1.75,-3.95) 18(-1.25,-3.95) 19(-0.75,-3.95) 20(-0.25,-3.95) 21(0.25,-3.95) 22(0.75,-3.95) 23(1.25,-3.95) 24(1.75,-3.95) 25(2.25,-3.95) 26(2.75,-3.95) 41(2.75,3.95) 42(2.25,3.95) 43(1.75,3.95) 44(1.25,3.95) 45(0.75,3.95) 46(0.25,3.95) 47(-0.25,3.95) 48(-0.75,3.95) 49(-1.25,3.95) 50(-1.75,3.95) 51(-2.25,3.95) 52(-2.75,3.95)
  rect 5.5x6.55 smd: 53(0,0)
  silkscreen extent -4.57,-4 3.5,4, body extent -3.55,-4.05 3.55,4.05, height 0.8
RESC1005X35N [mm] "Chip Resistor, EIA 0402, Metric 1005, Body 1.0x0.5mm, IPC Medium Density"
  rect 0.58x0.62 smd: 1(-0.47,0) 2(0.47,0)
  body extent -0.52,-0.27 0.53,0.28, height 0.35
RESC1608X55N [mm] "Chip Resistor, EIA 0603, Metric 1608, Body 1.6x0.8mm, IPC Medium Density"
  rect 0.9x1 smd: 1(-0.8,0) 2(0.8,0)
  body extent -0.87,-0.47 0.88,0.48, height 0.55
RESC1608X64N [mm] "Chip Resistor, EIA 0603, Metric 1608, Body 1.6x0.8mm, IPC Medium Density"
  rect 0.85x1 smd: 1(-0.8,0) 2(0.8,0)
  body extent -0.87,-0.47 0.88,0.48, height 0.64
RESC2012X60N [mm] "Chip Resistor, EIA 0805, Metric 2012, Body 2.0x1.2mm, IPC Medium Density"
  rect 0.95x1.4 smd: 1(-1,0) 2(1,0)
  silkscreen extent 0,-0.55 0,0.55, body extent -1.1,-0.67 1.1,0.68, height 0.6
RESC3216X65N [mm] "Chip Resistor, EIA 1206, Metric 3216, Body 3.2x1.6mm, IPC Medium Density"
  rect 1.15x1.8 smd: 1(-1.45,0) 2(1.45,0)
  silkscreen extent -0.5,-0.9 0.5,0.9, body extent -1.67,-0.87 1.68,0.88, height 0.65
SAMTEC_MTLW-107-07-L-D-250 [mm] "14 Contacts - Pitch 2.54mm - Dual Row Through Mount Straight Header (Post Lead = 6.35mm, Tail Lead 3.05mm, Insulator 1.52mm)"
  round 1.7 hole 1: 1(-7.62,-1.27) 2(-7.62,1.27) 3(-5.08,-1.27) 4(-5.08,1.27) 5(-2.54,-1.27) 6(-2.54,1.27) 7(0,-1.27) 8(0,1.27) 9(2.54,-1.27) 10(2.54,1.27) 11(5.08,-1.27) 12(5.08,1.27) 13(7.62,-1.27) 14(7.62,1.27)
  silkscreen extent -8.89,-3.28 8.89,2.51, body extent -8.89,-2.51 8.89,2.51, height 7.87
SAMTEC_TSW-108-07-L-S-LL [mm] "8 Contacts - Pitch 2.54mm - Single Row  Through Mount Straigh Header (Post Lead 5.84mm, Tail Lead 2.54mm, Insulator 2.54mm)"
  round 1.7 hole 1: 1(0,0) 2(2.54,0) 3(5.08,0) 4(7.62,0) 5(10.16,0) 6(12.7,0) 7(15.24,0) 8(17.78,0)
  silkscreen extent -1.27,-1.27 19.05,1.93, body extent -1.27,-1.27 19.05,1.27, height 8.38
"SKS-HIRSCHMANN_930 176-100" [mm] "Black Socket For Banana 4mm"
  round 10.5 hole 6.2: 1(0,0)
  silkscreen extent -5.5,-5.5 5.5,5.5, body extent -5,-5 5,5, height 5
SOIC127P600X175-8N [mm] "SOIC 8, Pitch 1.27mm - Body 4x5mm, IPC Medium Density"
  rect 1.55x0.6 smd: 1(-2.7,1.905) 2(-2.7,0.635) 3(-2.7,-0.635) 4(-2.7,-1.905) 5(2.7,-1.905) 6(2.7,-0.635) 7(2.7,0.635) 8(2.7,1.905)
  silkscreen extent -2.52,-2.5 1.55,2.88, body extent -3.1,-2.5 3.1,2.5, height 1.75
SOIC127P1030X265-21N-R381X432 [mm] "SOIC 20, Pitch 1.27mm - Body 7.5x12.9mm, (w/thermal tab 3.81mm X 4.32mm), IPC Medium Density"
  rect 2x0.6 smd: 1(-4.65,5.715) 2(-4.65,4.445) 3(-4.65,3.175) 4(-4.65,1.905) 5(-4.65,0.635) 6(-4.65,-0.635) 7(-4.65,-1.905) 8(-4.65,-3.175) 9(-4.65,-4.445) 10(-4.65,-5.715) 11(4.65,-5.715) 12(4.65,-4.445) 13(4.65,-3.175) 14(4.65,-1.905) 15(4.65,-0.635) 16(4.65,0.635) 17(4.65,1.905) 18(4.65,3.175) 19(4.65,4.445) 20(4.65,5.715)
  rect 3.8x4.3 smd paste-0.74: 21(0,0)
  silkscreen extent -4.37,-6.5 3.25,6.67, body extent -5.18,-6.5 5.18,6.5, height 1.68
SOP50P310X90-8N [mm] "SOP, 0.50mm pitch; 8 pin, 2.30mm W X 2.00mm L X 0.90mm H body, PC Medium Density"
  rect 0.85x0.3 smd: 1(-1.55,0.75) 2(-1.55,0.25) 3(-1.55,-0.25) 4(-1.55,-0.75) 5(1.55,-0.75) 6(1.55,-0.25) 7(1.55,0.25) 8(1.55,0.75)
  silkscreen extent -1.82,-1 0.8,1.53, body extent -1.62,-1 1.62,1, height 0.9
SOP65P490X110-8N [mm] "SOP, 0.65mm pitch; 8 pin, 3.00mm W X 3.00mm L X 1.10mm H body, IPC Medium Density"
  rect 1.5x0.45 smd: 1(-2.2,0.975) 2(-2.2,0.325) 3(-2.2,-0.325) 4(-2.2,-0.975) 5(2.2,-0.975) 6(2.2,-0.325) 7(2.2,0.325) 8(2.2,0.975)
  silkscreen extent -2.82,-1.5 1.12,1.83, body extent -2.45,-1.55 2.45,1.55, height 1.1
SOT65P210X110-5N [mm] "SOT353, SC70-5, SOT, 0.65mm Pitch, 5 pin, 1.25mm W X 2.00mm L X 1.10mm H, IPC Medium Density"
  rect 0.95x0.4 smd: 1(-1.1,0.65) 2(-1.1,0) 3(-1.1,-0.65) 4(1.1,-0.65) 5(1.1,0.65)
  silkscreen extent -1.43,-1 0.3,1.47, body extent -1.2,-1.1 1.2,1.1, height 1.1
SW_TYCO_1571983-1 [mm] "Pitch 1.27mm,  Body 3.66x6.2mm, 2 Ways SPST Surface-Mount DIP Switch, TYCO GDH Serie"
  rect 1.55x0.55 smd: 1(-3.8,0.635) 2(-3.8,-0.635) 3(3.8,-0.635) 4(3.8,0.635)
  silkscreen extent -4.42,-1.85 2.7,1.85, body extent -4.06,-1.83 4.06,1.83, height 2.36
"TEXAS_RGY (S-PVQFN–N14)" [mm] "PSON, JEDEC MO-241BA, TEXAS RGY (S-PVQFN–N14), 0.50mm Pitch, Square; 5 Pin X 4 Pin, 3.5mm X 3.5mm X 1.00mm H body (w/thermal tab 2.05 X 2.05mm)"
  oval 0.3x0.85 smd: 1(-0.75,1.75) 7(-0.75,-1.75) 8(0.75,-1.75) 14(0.75,1.75)
  oval 0.85x0.3 smd: 2(-1.75,1) 3(-1.75,0.5) 4(-1.75,0) 5(-1.75,-0.5) 6(-1.75,-1) 9(1.75,-1) 10(1.75,-0.5) 11(1.75,0) 12(1.75,0.5) 13(1.75,1)
  rect 2.05x2.05 smd: 15(0,0)
  Top Layer region: -1.025,1.025 -0.375,1.025 -0.375,2.15 -0.175,2.15 -0.175,1.425 0.175,1.425 0.175,2.15 0.375,2.15 0.375,1.025 1.025,1.025 1.025,-1.025 0.375,-1.025 0.375,-2.15 0.175,-2.15 0.175,-1.425 -0.175,-1.425 -0.175,-2.15 -0.375,-2.15 -0.375,-1.025 -1.025,-1.025
  silkscreen extent -1.75,-1.75 1.75,2.92, body extent -1.82,-1.82 1.83,1.83, height 1
TO170P1394X457-6N-R900X1060 [mm] "TO, 1.70mm Pitch; 5 Pin, 13.945mm L X 8.89mm W X 4.572mm H body, IPC Medium Density"
  rect 2.95x1.05 smd: 1(-6.3,3.4) 2(-6.3,1.7) 3(-6.3,0) 4(-6.3,-1.7) 5(-6.3,-3.4)
  rect 9x10.6 smd: 6(3.25,0)
  silkscreen extent -7.63,-5.1 -1.6,5.1, body extent -6.93,-5.27 7.11,5.27, height 4.63
TPS127 [mm] "1.27 x  1.27mm SMD Test Point Area"
  rect 1.27x1.27 smd paste-1.27: 1(0,0)
  silkscreen extent -0.94,-0.94 0.94,0.94
TRIM_BOURNS_3223W [mm] "Bourns 3223W Trimming Potentiometer"
  rect 0.9x1.6 smd: 1(-1.4,-1.14) 3(1.4,-1.14)
  rect 1.3x1.3 smd: 2(0,1.29)
  silkscreen extent -1.95,-1.59 1.95,1.59, body extent -1.95,-1.81 1.95,1.81, height 4.16
TYCO_1-1337542-0_a [mm] "50 Ohms  BNC Elbow PCB Socket With Mounting Posts"
  round 1.6 hole 0.9: 1(-5.48,0) 2(-5.48,2.54)
  round 2.7 hole 2: 3(-0.4,5.08) 3(-0.4,-5.08)
  silkscreen extent -7.5,-7.35 28,7.35, body extent -7.5,-8.08 28,8.08, height 14.79

## Part data
+2V5_ADC +2V5_adj +2V5_LDO +3V6_adj +3V6_Clock_1 +3V6_Clock_2 +3V6_LDO +5V_ADC +5V_adj +5V_DAC +5V_LDO +5V_REFBUFEN +7V_opamp +7V_supply +Vref_DAC -7V_opamp -7V_supply CLR_clk CLR_con CNV_ADC CNV_clk DDR_ADC EN_1 EN_1_SW EN_2 EN_2_SW Im_1 Im_2 IN+_1 IN+_2 LVDS_ADC OUT_opamp REF_ADC REF_opamp REFOUT1 REFOUT1_opamp REFOUT2 REFOUT3 REFOUT4 Rshunt_1 Rshunt_2 Supply_+2V5 Supply_+3V6 Supply_+5V Supply_Vref Supply_Vs+ V+_op1177 Vout1 Vout2 Vref_pot Vs+_1 Vs+_2 Vs+_LDO Vs+_noise Vs-_1 Vs-_2 Vs_pot_1 Vs_pot_2: library part SMD_PAD_1.27X1.27MM, Author="CERN DEM JLC", ComponentHeight=0mm, Component Type="Standard (No BOM)", CreateDate=12/01/2008, Family="Test Point", HelpURL=Undefined, LatestRevisionDate=12/01/2008, Mounted=No, PackageDescription="1.27mm x 1.27mm PCB Copper Area (SMD Test Point)", Part Description="1.27mm x 1.27mm PCB Copper Area (SMD Test Point)", Part Number=SMD_PAD_1.27X1.27MM, Pin Count=1, Sense=No, SMD=Yes, Socket=No, Status=None
C1 C6 C8 C9 C15 C16 C17 C18 C19 C30 C33 C38 C39 C43 C45: library part CC0805_100NF_50V_10%_X7R, "Non-polarised capacitor", Case=0805, Manufacturer=GENERIC, Manufacturer1 ComponentHeight=1mm, Manufacturer1 Example=TDK, Manufacturer1 Part Number=C2012X7R1H104K085AA, Tolerance=±10%, Voltage=50V, Author="CERN DEM JLC", Component Type=Standard, CreateDate=03/12/2007, HelpURL=\\cern.ch\dfs\Applications\Altium\Datasheets\CC0805_X7R_TDK_C.pdf, LatestRevisionDate=22/04/2015, Manufacturer Part Number=CC0805_100NF_50V_10%_X7R, Mounted=Yes, Part Description="SMD Multilayer Chip Ceramic Capacitor", Part Number=CC0805_100NF_50V_10%_X7R, Pin Count=2, Sense=No, SMD=Yes, Socket=No, Status=Preferred, TC=X7R
C2 C5 C37 C42 C44: library part CAE530-540_10UF_35V_20%, "Polarised capacitor", Case=C, Manufacturer=PANASONIC, Manufacturer Part Number=EEEFK1V100AR, Tolerance=±20%, Voltage=35V, Author="CERN DEM JLC", ComponentHeight=5.8mm, Component Type=Standard, CreateDate=03/12/2007, HelpURL=\\cern.ch\dfs\Applications\Altium\Datasheets\CAE_PANASONIC_FK.pdf, LatestRevisionDate=05/11/2014, Mounted=Yes, Part Description="Aluminum Electrolytic SMT Capacitor", Part Number=CAE530-540_10UF_35V_20%, Pin Count=2, Sense=No, SMD=Yes, Socket=No, Status="Not Recommended"
C3: library part CC0603_220PF_50V_5%_NP0, "Non-polarised capacitor", Case=0603, Manufacturer=GENERIC, Manufacturer1 ComponentHeight=0.87mm, Manufacturer1 Example=PHYCOMP, Manufacturer1 Part Number=223886715221, Tolerance=±5%, Voltage=50V, Author="CERN DEM JLC", Component Type=Standard, CreateDate=03/12/2007, HelpURL=\\cern.ch\dfs\Applications\Altium\Datasheets\CC0603_NP0_PHYCOMP.pdf, LatestRevisionDate=03/12/2007, Manufacturer Part Number=CC0603_220PF_50V_5%_NP0, Mounted=Yes, Part Description="SMD Multilayer Chip Ceramic Capacitor", Part Number=CC0603_220PF_50V_5%_NP0, Pin Count=2, Sense=No, SMD=Yes, Socket=No, Status=Preferred, TC=C0G/NP0
C4 C31 C32 C34 C35: library part CC0805_47UF_6.3V_20%_X5R, "Non-polarised capacitor", Case=0805, Manufacturer=GENERIC, Manufacturer1 ComponentHeight=1.4mm, Manufacturer1 Example=KEMET, Manufacturer1 Part Number=C0805C476M9PACTU, Tolerance=±20%, Voltage=6.3V, Author="CERN DEM JLC", Component Type=Standard, CreateDate=16/10/2012, HelpURL=\\cern.ch\dfs\Applications\Altium\Datasheets\CC0805_X5R_KEMET.pdf, LatestRevisionDate=16/10/2012, Manufacturer Part Number=CC0805_47UF_6.3V_20%_X5R, Mounted=Yes, Part Description="SMD Multilayer Chip Ceramic Capacitor", Part Number=CC0805_47UF_6.3V_20%_X5R, Pin Count=2, Sense=No, SMD=Yes, Socket=No, Status=Preferred, TC=X5R
C7: library part CTE3216-18_1UF_35V_10%_LESR3000, "Polarised capacitor", Case=A, Manufacturer=GENERIC, Manufacturer1 ComponentHeight=1.8mm, Manufacturer1 Example=AVX, Manufacturer1 Part Number=TPSA105K035R3000, Tolerance=±10%, Voltage=35V, Author="CERN DEM JLC", Component Type=Standard, CreateDate=05/05/2008, HelpURL=\\cern.ch\dfs\Applications\Altium\Datasheets\CTE-LESR_AVX_TPS.pdf, LatestRevisionDate=20/01/2009, Manufacturer Part Number=CTE3216-18_1UF_35V_10%_LESR3000, Mounted=Yes, Part Description="Low ESR 3R0 Solid Tantalum Chip Capacitor", Part Number=CTE3216-18_1UF_35V_10%_LESR3000, Pin Count=2, Sense=No, SMD=Yes, Socket=No, Status=Preferred
C10 C11 C12 C13 C14: library part CC0805_10UF_25V_10%_X5R, "Non-polarised capacitor", Case=0805, Manufacturer=GENERIC, Manufacturer1 ComponentHeight=0.95mm, Manufacturer1 Example=MURATA, Manufacturer1 Part Number=GRM219R61E106KA12D, Tolerance=±10%, Voltage=25V, Author="CERN DEM JLC", Component Type=Standard, CreateDate=25/10/2012, HelpURL=\\cern.ch\dfs\Applications\Altium\Datasheets\CC0805_X5R_MURATA_GRM.pdf, LatestRevisionDate=06/09/2016, Manufacturer Part Number=CC0805_10UF_25V_10%_X5R, Mounted=Yes, Part Description="SMD Multilayer Chip Ceramic Capacitor", Part Number=CC0805_10UF_25V_10%_X5R, Pin Count=2, Sense=No, SMD=Yes, Socket=No, Status=Preferred, TC=X5R
C20 C21 C22 C23 C28 C29 C40 C41: library part CC1206_10UF_25V_10%_X7R, "Non-polarised capacitor", Case=1206, Manufacturer=GENERIC, Manufacturer1 ComponentHeight=1.8mm, Manufacturer1 Example=KEMET, Manufacturer1 Part Number=C1206C106K4RACTU, Manufacturer Part Number=CC1206_10uF_25V_10%_X7R, Tolerance=±10%, Voltage=25V, Author="CERN DEM JLC", Component Type=Standard, CreateDate=12/09/2012, HelpURL=\\cern.ch\dfs\Applications\Altium\Datasheets\CC1206_X7R_KEMET.pdf, LatestRevisionDate=12/09/2012, Mounted=Yes, Part Description="SMD Multilayer Chip Ceramic Capacitor", Part Number=CC1206_10UF_25V_10%_X7R, Pin Count=2, Sense=No, SMD=Yes, Socket=No, Status=Preferred, TC=X7R
C24 C25 C26 C27 C46 C47 C48 C49 C50: library part CTE3528-21_47UF_6.3V_10%_LESR0250, "Polarised capacitor", Case=B, Manufacturer=GENERIC, Manufacturer1 ComponentHeight=2.1mm, Manufacturer1 Example=AVX, Manufacturer1 Part Number=TPSB476K006R0250, Tolerance=±10%, Voltage=6.3V, Author="CERN DEM JLC", Component Type=Standard, CreateDate=05/05/2008, HelpURL=\\cern.ch\dfs\Applications\Altium\Datasheets\CTE-LESR_AVX_TPS.pdf, LatestRevisionDate=20/01/2009, Manufacturer Part Number=CTE3528-21_47UF_6.3V_10%_LESR0250, Mounted=Yes, Part Description="Low ESR 0R25 Solid Tantalum Chip Capacitor", Part Number=CTE3528-21_47UF_6.3V_10%_LESR0250, Pin Count=2, Sense=No, SMD=Yes, Socket=No, Status=Preferred
C36: library part CC0805_2.2UF_50V_10%_X7R, "Non-polarised capacitor", Case=0805, Manufacturer=GENERIC, Manufacturer1 ComponentHeight=1.40mm, Manufacturer1 Example=MURATA, Manufacturer1 Part Number=GRM21BR61H225KA73L, Tolerance=±10%, Voltage=50V, Author="CERN DEM JLC", Component Type=Standard, CreateDate=18/08/2014, HelpURL=\\cern.ch\dfs\Applications\Altium\Datasheets\CC0805_X7R_MURATA_GRM.pdf, LatestRevisionDate=18/08/2014, Manufacturer Part Number=CC0805_2.2UF_50V_10%_X7R, Mounted=Yes, Part Description="SMD Multilayer Chip Ceramic Capacitor", Part Number=CC0805_2.2UF_50V_10%_X7R, Pin Count=2, Sense=No, SMD=Yes, Socket=No, Status=Preferred, TC=X7R
IC1: "Octal, 16-Bit, 1.5Msps/Ch  Simultaneous Sampling ADC", Case=QFN52, Manufacturer="LINEAR TECHNOLOGY", Author="LNLS DIG LOS", Bonding=No, ComponentHeight=0.8mm, Component Type=Standard, CreateDate=21/02/2018, Device=LTC2320IUKG, LatestRevisionDate=08/03/2018, Manufacturer Part Number=LTC2320IUKG, Mounted=Yes, PackageDescription="QFP, 0.50mm pitch, square; 12 pin X 14 pin, 7.00mm X 8.00mm, IPC Medium Density", Part Description="Octal, 16-Bit, 1.5Msps/Ch Simultaneous Sampling ADC", Part Number=LTC2320IUKG, Pin Count=53, PressFit=No, Sense=No, SMD=Yes, Socket=No
IC2: "1 nV/sqrt Hz Low Noise Instrumentation Amplifier", Case=SOIC8, Manufacturer="ANALOG DEVICES", Author="CERN DEM JLC", Bonding=No, ComponentHeight=1.75mm, Component Type=Standard, CreateDate=31/08/2011, Device=AD8429BRZ, HelpURL=\\cern.ch\dfs\Applications\Altium\Datasheets\AD8429BRZ.pdf, LatestRevisionDate=31/08/2011, Manufacturer Part Number=AD8429BRZ, Mounted=Yes, PackageDescription="SOIC 8, Pitch 1.27mm - Body 4x5mm, IPC Medium Density", Part Description="1nV/sqrt Hz Low Noise Instrumentation Amplifier", Part Number=AD8429BRZ, Pin Count=8, PressFit=No, Sense=No, SMD=Yes, Socket=No
IC3 IC4 IC5 IC7 IC8 IC9 IC10 IC11 IC12 IC13 IC14: "TinyLogic® HS Inverter (Open Drain Output)", Case=SOT353, Manufacturer="FAIRCHILD SEMICONDUCTOR", Manufacturer Part Number="git pu", Author="LNLS DIG LOS", Bonding=No, ComponentHeight=1.1mm, Component Type=Standard, CreateDate=06/06/2018, Device=NC7SVU04P5X, LatestRevisionDate=06/06/2018, Mounted=Yes, PackageDescription="SOT353, SC70-5, SOT, 0.65mm Pitch, 5 pin, 1.25mm W X 2.00mm L X 1.10mm H, IPC Medium Density", Part Description="TinyLogic® ULP-A Unbuffered Inverter", Part Number=NC7SVU04P5X, Pin Count=5, PressFit=No, Sense=No, SMD=Yes, Socket=No
IC6: "TinyLogic® UHS D-Type Flip-Flop With Preset And Clear", Case=TSSOP8, Manufacturer="FAIRCHILD SEMICONDUCTOR", Author="LNLS DIG LOS", Bonding=No, ComponentHeight=0.9mm, Component Type=Standard, CreateDate=06/06/2018, Device=NC7SV74K8X, LatestRevisionDate=06/06/2018, Manufacturer Part Number=NC7SV74K8X, Mounted=Yes, PackageDescription="SOP, 0.50mm pitch; 8 pin, 2.30mm W X 2.00mm L X 0.90mm H body, PC Medium Density", Part Description="TinyLogic® ULP-A D-Type Flip-Flop with Preset and Clear", Part Number=NC7SV74K8X, Pin Count=8, PressFit=No, Sense=No, SMD=Yes, Socket=No
IC15 IC16 IC18 IC23: "3A, Fast Transient Response, Low Noise, LDO Regulators", Case=TO-263, Manufacturer="LINEAR TECHNOLOGY", Author="LNLS DIG GBMB", Bonding=No, ComponentHeight=4.57mm, Component Type=Standard, CreateDate=17/02/2017, Device=LT1764AEQ#PBF, LatestRevisionDate=17/02/2017, Manufacturer Part Number=LT1764AEQ#PBF, Mounted=Yes, PackageDescription="TO, 1.70mm Pitch; 5 Pin, 13.945mm L X 8.89mm W X 4.572mm H body, IPC Medium Density", Part Description="2.5V 3A, Fast Transient Response, Low Noise, LDO Regulators", Part Number=LT1764AEQ#PBF, Pin Count=6, PressFit=No, Sense=No, SMD=Yes, Socket=No
IC17: "1.24V to 5.30V Adjustable Micropower Voltage Reference", Case=SOIC8, Manufacturer="TEXAS INSTRUMENTS", Author="CERN DEM JLC", Bonding=No, ComponentHeight=1.75mm, Component Type=Standard, CreateDate=24/03/2015, Device=LM385BM/NOPB, HelpURL=\\cern.ch\dfs\Applications\Altium\Datasheets\LM385BM-NOPB.pdf, LatestRevisionDate=24/03/2015, Manufacturer Part Number=LM385BM/NOPB, Mounted=Yes, PackageDescription="SOIC 8, Pitch 1.27mm, Body 4x5mm, IPC Medium Density", Part Description="1.24V to 5.30V Adjustable Micropower Voltage Reference", Part Number=LM385BM/NOPB, Pin Count=8, PressFit=No, Sense=No, SMD=Yes, Socket=No
IC19 IC20: "Rail-to-Rail I/O, 2A, Power amplifier", Case=SOIC20, Manufacturer="TEXAS INSTRUMENTS", Author="LNLS DIG LOS", Bonding=No, ComponentHeight=2.65mm, Component Type=Standard, CreateDate=19/02/2018, Device=OPA569AIDWP, LatestRevisionDate=08/03/2018, Manufacturer Part Number=OPA569AIDWP, Mounted=Yes, PackageDescription="SOIC 20, Pitch 1.27mm - Body 7.5x12.9mm, (w/thermal tab 3.81mm X 4.32mm), IPC Medium Density", Part Description="Rail-to-Rail I/O, 2A, Power amplifier", Part Number=OPA569AIDWP, Pin Count=21, PressFit=No, Sense=No, SMD=Yes, Socket=No
IC21: "Quad 2-Input AND Gate", Case=DIP14-300, Manufacturer="NXP SEMICONDUCTORS", Author="CERN DEM JLC", Bonding=No, ComponentHeight=4.2mm, Component Type=Standard, CreateDate=14/01/2008, Device=HEF4081BP, HelpURL=\\cern.ch\dfs\Applications\Altium\Datasheets\HEF4081BP.pdf, LatestRevisionDate=14/01/2008, Manufacturer Part Number=HEF4081BP, Mounted=Yes, PackageDescription="DIP; 14 Leads; Row Spacing 7.62 mm; Pitch 2.54 mm", Part Description="Quad 2-Input AND Gate", Part Number=HEF4081BP, Pin Count=12, PressFit=No, Sense=No, SMD=No, Socket=Yes
IC22: "16-Bit, Ultra-Low Power, Voltage-Output Digital-to-Analog Converter", Case=QFN14, Manufacturer="TEXAS INSTRUMENTS", Author="LNLS DIG LOS", Bonding=No, ComponentHeight=1mm, Component Type=Standard, CreateDate=13/06/2018, Device=DAC8831ICRGYT, LatestRevisionDate=13/06/2018, Manufacturer Part Number=DAC8831ICRGYT, Mounted=Yes, PackageDescription="TEXAS Case Style RGY (S-PVQFN-N14), QFN, 0.50mm Pitch, Square; 14 Pin, 3.5mm L X 3.5mm W X 1.00mm H body (w/thermal tab 2.15 X 2.15mm)", Part Description="16-Bit, Ultra-Low Power, Voltage-Output Digital-to-Analog Converter", Part Number=DAC8831ICRGYT, Pin Count=15, PressFit=No, Sense=No, SMD=Yes, Socket=No
IC24: "Operational Amplifier", Case=MSOP8, Manufacturer="ANALOG DEVICES", Author="LNLS DIG LOS", Bonding=No, ComponentHeight=1.1mm, Component Type=Standard, CreateDate=21/06/2018, Device=OP1177ARMZ, LatestRevisionDate=21/06/2018, Manufacturer Part Number=OP1177ARMZ, Mounted=Yes, PackageDescription="SOP, 0.65mm pitch; 8 pin, 3.00mm W X 3.00mm L X 1.10mm H body, IPC Medium Density", Part Description="Precision Low Noise, Low Input Bias Current Operational Amplifiers", Part Number=OP1177ARMZ, Pin Count=8, PressFit=No, Sense=No, SMD=Yes, Socket=No
J1 J2 J6: library part SAMTEC_TSW-108-07-L-S-LL, "Connector 8 Male", Manufacturer=SAMTEC, Manufacturer Part Number=TSW-108-07-L-S-LL, Author="CERN DEM MR", ComponentHeight=8.38mm, Component Type=Standard, CreateDate=15/07/2016, Family="Header 8", HelpURL=\\cern.ch\dfs\Applications\Altium\Datasheets\SAMTEC_TSW-108-07-L-S-LL.pdf, LatestRevisionDate=15/07/2016, Mounted=Yes, Part Description="8 Contacts - Pitch 2.54mm - Single Row  Through Mount Straigh Header (Post Lead 5.84mm, Tail Lead 2.54mm, Insulator 2.54mm)", Part Number=SAMTEC_TSW-108-07-L-S-LL, Pin Count=8, PressFit=No, Sense=No, SMD=No, Socket=No, Status=None
J3 J7: library part TYCO_1-1337542-0_a, Manufacturer="TYCO ELECTRONICS", Manufacturer Part Number="1-1337542-0 + 1-1634816-0 + 1-1634817-0", Author="CERN DEM JLC", ComponentHeight=14.93mm, Component Type=Standard, CreateDate=02/02/2012, Family=BNC, HelpURL=\\cern.ch\dfs\Applications\Altium\Datasheets\TYCO_1-1337542-0.pdf, LatestRevisionDate=02/02/2012, Mounted=Yes, Part Description="50 Ohms  BNC Elbow PCB Socket With Mounting Posts + Mount Nut + Lockwasher", Part Number=TYCO_1-1337542-0_a, Pin Count=2, PressFit=No, Sense=No, SMD=No, Socket=No, Status=None
J4: library part MOLEX_22-27-2041, "Connector 4 Male", Manufacturer=MOLEX, Manufacturer Part Number=22-27-2041, Author="CERN DEM JLC", ComponentHeight=11.7mm, Component Type=Standard, CreateDate=04/12/2008, Family=KK®, HelpURL=\\cern.ch\dfs\Applications\Altium\Datasheets\MOLEX_22-27-2041.pdf, LatestRevisionDate=04/12/2008, Mounted=Yes, Part Description="2.54mm (.100\") Pitch KK® Wire-to-Board Header, Vertical, with Friction Lock, 4 Circuits, Tin (Sn) Plating", Part Number=MOLEX_22-27-2041, Pin Count=4, PressFit=No, Sense=No, SMD=No, Socket=No, Status=None
J5: library part SAMTEC_MTLW-107-07-L-D-250, "Connector 14 Male", Manufacturer=SAMTEC, Manufacturer Part Number=MTLW-107-07-L-D-250, Author="CERN DEM JLC", ComponentHeight=7.87mm, Component Type=Standard, CreateDate=27/08/2013, Family="Header 14", HelpURL=\\cern.ch\dfs\Applications\Altium\Datasheets\SAMTEC_MTLW-107-07-L-D-250.pdf, LatestRevisionDate=27/08/2013, Mounted=Yes, Part Description="14 Contacts - Pitch 2.54mm - Dual Row Through Mount Straight Header (Post Lead = 6.35mm, Tail Lead 3.05mm, Insulator 1.52mm)", Part Number=SAMTEC_MTLW-107-07-L-D-250, Pin Count=14, PressFit=No, Sense=No, SMD=No, Socket=No, Status=None
L1 L2 L3 L4 L5 L7: library part IND0603_MURATA_BLM18AG102SN1D, "Inductor", Case=0603, Manufacturer=MURATA, Manufacturer Part Number=BLM18AG102SN1D, Power=400mA, Resistance=0.50R, Tolerance=±25%, Author="LNLS DIG GBMB", ComponentHeight=0.95mm, Component Type=Standard, CreateDate=03/11/2017, LatestRevisionDate=03/11/2017, Mounted=Yes, Part Description="SMD EMIFIL Suppression Chip Ferrite Bead", Part Number=IND0603_MURATA_BLM18AG102SN1D, Pin Count=2, Sense=No, SMD=Yes, Socket=No, Status=None
L6: library part IND0603_MURATA_BLM18KG601SN1, "Inductor", Case=0603, Manufacturer=MURATA, Manufacturer Part Number=BLM18KG601SN1, Power=1.3A, Resistance=0.15R, Tolerance=±25%, Author="LNLS DIG LOS", ComponentHeight=0.95mm, Component Type=Standard, CreateDate=21/06/2018, LatestRevisionDate=21/06/2018, Mounted=Yes, Part Description="SMD EMIFIL Suppression Chip Ferrite Bead for  GHz Noise", Part Number=IND0603_MURATA_BLM18KG601SN1, Pin Count=2, Sense=No, SMD=Yes, Socket=No, Status=None
load_1 load_2: library part "SKS-HIRSCHMANN_930 176-100", "Single Terminal Socket", Manufacturer="SKS KONTATTECHNIK - HIRSCHMANN", Manufacturer Part Number="930 176-100", Author="CERN DEM JLC", ComponentHeight=5mm, Component Type=Standard, CreateDate=12/06/2008, Family=Banana, HelpURL="\\cern.ch\dfs\Applications\Altium\Datasheets\SKS-HIRSCHMANN_930 176-100.pdf", LatestRevisionDate=12/06/2008, Mounted=Yes, Part Description="BIL 20 Black Socket For Banana 4mm", Part Number="SKS-HIRSCHMANN_930 176-100", Pin Count=1, PressFit=No, Sense=No, SMD=No, Socket=No, Status=None
P1: library part TRIM_11T_100K_BOURNS_3223W-1-104E, "Trimming Potentiometer", Case=3223W, Manufacturer=BOURNS, Manufacturer Part Number=3223W-1-104E, Power=0.125W, Tolerance=±20%, Author="CERN DEM JLC", ComponentHeight=4.16mm, Component Type=Standard, CreateDate=31/03/2011, HelpURL=\\cern.ch\dfs\Applications\Altium\Datasheets\TRIM_BOURNS_3223W.pdf, LatestRevisionDate=18/12/2012, Mounted=Yes, Part Description="11 Turns SMD Trimpot® Trimming Potentiometer (Top Adjust)", Part Number=TRIM_11T_100K_BOURNS_3223W-1-104E, Pin Count=3, Sense=No, SMD=Yes, Socket=No, TC=±100ppm/°C
P2: library part TRIM_11T_2K_BOURNS_3223W-1-202E, "Trimming Potentiometer", Case=3223W, Manufacturer=BOURNS, Manufacturer Part Number=3223W-1-202E, Power=0.125W, Tolerance=±20%, Author="CERN DEM JLC", ComponentHeight=4.16mm, Component Type=Standard, CreateDate=31/03/2011, HelpURL=\\cern.ch\dfs\Applications\Altium\Datasheets\TRIM_BOURNS_3223W.pdf, LatestRevisionDate=18/12/2012, Mounted=Yes, Part Description="11 Turns SMD Trimpot® Trimming Potentiometer (Top Adjust)", Part Number=TRIM_11T_2K_BOURNS_3223W-1-202E, Pin Count=3, Sense=No, SMD=Yes, Socket=No, TC=±100ppm/°C
R1 R3: library part R0603_25R5_0.1%_0.063W_10PPM, "Resistor - 0.1%", Case=0603, Manufacturer=GENERIC, Manufacturer1 ComponentHeight=0.5mm, Manufacturer1 Example="TYCO HOLSWORTHY", Manufacturer1 Part Number=RN73C1J25R5BTDF, Power=0.063W, Tolerance=±0.1%, Author="CERN DEM JLC", Component Type=Standard, CreateDate=03/12/2007, HelpURL=\\cern.ch\dfs\Applications\Altium\Datasheets\R0603_Tyco_RN73.pdf, LatestRevisionDate=13/03/2008, Manufacturer Part Number=R0603_25R5_0.1%_0.063W_10PPM, Mounted=Yes, Part Description="Thin Film Chip Resistor", Part Number=R0603_25R5_0.1%_0.063W_10PPM, Pin Count=2, Sense=No, SMD=Yes, Socket=No, Status="Not recommended", TC=±10ppm
R2: library part R1206_0R1_1%_0.25W_100PPM_YAGEO_PT, "Resistor - 1%", Case=1206, Manufacturer="YAGEO PHYCOMP", Manufacturer Part Number=PT1206FR-070R1L, Power=0.25W, Tolerance=±1%, Author="CERN DEM JMW", ComponentHeight=0.65mm, Component Type=Standard, CreateDate=06/07/2015, HelpURL=\\cern.ch\dfs\Applications\Altium\Datasheets\R1206_YAGEO_PT.pdf, LatestRevisionDate=06/07/2015, Mounted=Yes, Part Description="Current Sensor, Low TCR Chip Resistor", Part Number=R1206_0R1_1%_0.25W_100PPM_YAGEO_PT, Pin Count=2, Sense=No, SMD=Yes, Socket=No, Status=None, TC=±100ppm/°C
R4 R6 R9 R13 R18 R21: library part R0603_100R_0.1%_0.063W_10PPM, "Resistor - 0.1%", Case=0603, Manufacturer=GENERIC, Manufacturer1 ComponentHeight=0.5mm, Manufacturer1 Example="TYCO HOLSWORTHY", Manufacturer1 Part Number=RN73C1J100RBTDF, Power=0.063W, Tolerance=±0.1%, Author="CERN DEM JLC", Component Type=Standard, CreateDate=03/12/2007, HelpURL=\\cern.ch\dfs\Applications\Altium\Datasheets\R0603_Tyco_RN73.pdf, LatestRevisionDate=13/03/2008, Manufacturer Part Number=R0603_100R_0.1%_0.063W_10PPM, Mounted=Yes, Part Description="Thin Film Chip Resistor", Part Number=R0603_100R_0.1%_0.063W_10PPM, Pin Count=2, Sense=No, SMD=Yes, Socket=No, Status="Not recommended", TC=±10ppm
R5 R7 R8 R10 R12 R14 R17 R19 R20 R22: library part R0603_10R_0.1%_0.063W_10PPM, "Resistor - 0.1%", Case=0603, Manufacturer=GENERIC, Manufacturer1 ComponentHeight=0.5mm, Manufacturer1 Example="TYCO HOLSWORTHY", Manufacturer1 Part Number=RN73C1J10RBTDF, Power=0.063W, Tolerance=±0.1%, Author="CERN DEM JLC", Component Type=Standard, CreateDate=03/12/2007, HelpURL=\\cern.ch\dfs\Applications\Altium\Datasheets\R0603_Tyco_RN73.pdf, LatestRevisionDate=13/03/2008, Manufacturer Part Number=R0603_10R_0.1%_0.063W_10PPM, Mounted=Yes, Part Description="Thin Film Chip Resistor", Part Number=R0603_10R_0.1%_0.063W_10PPM, Pin Count=2, Sense=No, SMD=Yes, Socket=No, Status="Not recommended", TC=±10ppm
R11 R16 R31 R32 R33 R34: library part R0603_1K_1%_0.1W_100PPM, "Resistor - 1%", Case=0603, Manufacturer=GENERIC, Manufacturer1 ComponentHeight=0.55mm, Manufacturer1 Example="NIC COMPONENT", Manufacturer1 Part Number=NRC06F1001TRF, Power=0.1W, Tolerance=±1%, Author="CERN DEM JLC", Component Type=Standard, CreateDate=03/12/2007, HelpURL=\\cern.ch\dfs\Applications\Altium\Datasheets\R0603_NIC_NRC.pdf, LatestRevisionDate=13/03/2008, Manufacturer Part Number=R0603_1K_1%_0.1W_100PPM, Mounted=Yes, Part Description="General Purpose Thick Film Chip Resistor", Part Number=R0603_1K_1%_0.1W_100PPM, Pin Count=2, Sense=No, SMD=Yes, Socket=No, Status=Preferred, TC=±100ppm/°C
R15: library part R0402_50R_0.1%_0.05W_25PPM, "Resistor - 0.1%", Case=0402, Manufacturer=GENERIC, Manufacturer1 ComponentHeight=0.38mm, Manufacturer1 Example="VISHAY DALE", Manufacturer1 Part Number=FC0402E50R0BTBS, Power=0.05W, Tolerance=±0.1%, Author="CERN DEM JMW", Component Type=Standard, CreateDate=11/08/2016, HelpURL=\\cern.ch\dfs\Applications\Altium\Datasheets\R0402_VISHAY_FC.pdf, LatestRevisionDate=11/08/2016, Manufacturer Part Number=R0402_50R_0.1%_0.05W_25PPM, Mounted=Yes, Part Description="Thin Film Precision Resistor", Part Number=R0402_50R_0.1%_0.05W_25PPM, Pin Count=2, Sense=No, SMD=Yes, Socket=No, Status="Not recommended", TC=±25ppm/°C
R23: library part R0805_4K75_0.1%_0.1W_10PPM, "Resistor - 0.1%", Case=0805, Manufacturer=GENERIC, Manufacturer1 ComponentHeight=0.6mm, Manufacturer1 Example="TYCO HOLSWORTHY", Manufacturer1 Part Number=RN73C2A4K75BTG, Power=0.1W, Tolerance=±0.1%, Author="CERN DEM JLC", Component Type=Standard, CreateDate=03/12/2007, HelpURL=\\cern.ch\dfs\Applications\Altium\Datasheets\R0805_Tyco_RN73.pdf, LatestRevisionDate=13/03/2008, Manufacturer Part Number=R0805_4K75_0.1%_0.1W_10PPM, Mounted=Yes, Part Description="Thin Film Chip Resistor", Part Number=R0805_4K75_0.1%_0.1W_10PPM, Pin Count=2, Sense=No, SMD=Yes, Socket=No, Status="Not recommended", TC=±10ppm
R24: library part R0805_1K6_1%_0.125W_100PPM, "Resistor - 1%", Case=0805, Manufacturer=GENERIC, Manufacturer1 ComponentHeight=0.6mm, Manufacturer1 Example="NIC COMPONENT", Manufacturer1 Part Number=NRC10F1601TRF, Power=0.125W, Tolerance=±1%, Author="CERN DEM JLC", Component Type=Standard, CreateDate=03/12/2007, HelpURL=\\cern.ch\dfs\Applications\Altium\Datasheets\R0805_NIC_NRC.pdf, LatestRevisionDate=13/03/2008, Manufacturer Part Number=R0805_1K6_1%_0.125W_100PPM, Mounted=Yes, Part Description="General Purpose Thick Film Chip Resistor", Part Number=R0805_1K6_1%_0.125W_100PPM, Pin Count=2, Sense=No, SMD=Yes, Socket=No, Status=Preferred, TC=±100ppm/°C
R25 R26 R41: library part R0805_1K5_0.1%_0.1W_10PPM, "Resistor - 0.1%", Case=0805, Manufacturer=GENERIC, Manufacturer1 ComponentHeight=0.6mm, Manufacturer1 Example="TYCO HOLSWORTHY", Manufacturer1 Part Number=RN73C2A1K5BTG, Power=0.1W, Tolerance=±0.1%, Author="CERN DEM JLC", Component Type=Standard, CreateDate=03/12/2007, HelpURL=\\cern.ch\dfs\Applications\Altium\Datasheets\R0805_Tyco_RN73.pdf, LatestRevisionDate=13/03/2008, Manufacturer Part Number=R0805_1K5_0.1%_0.1W_10PPM, Mounted=Yes, Part Description="Thin Film Chip Resistor", Part Number=R0805_1K5_0.1%_0.1W_10PPM, Pin Count=2, Sense=No, SMD=Yes, Socket=No, Status="Not recommended", TC=±10ppm
R27: library part R0603_2K4_1%_0.1W_100PPM, "Resistor - 1%", Case=0603, Manufacturer=GENERIC, Manufacturer1 ComponentHeight=0.55mm, Manufacturer1 Example="NIC COMPONENT", Manufacturer1 Part Number=NRC06F2401TRF, Power=0.1W, Tolerance=±1%, Author="CERN DEM JLC", Component Type=Standard, CreateDate=03/12/2007, HelpURL=\\cern.ch\dfs\Applications\Altium\Datasheets\R0603_NIC_NRC.pdf, LatestRevisionDate=13/03/2008, Manufacturer Part Number=R0603_2K4_1%_0.1W_100PPM, Mounted=Yes, Part Description="General Purpose Thick Film Chip Resistor", Part Number=R0603_2K4_1%_0.1W_100PPM, Pin Count=2, Sense=No, SMD=Yes, Socket=No, Status=Preferred, TC=±100ppm/°C
R28: library part R0603_66K5_0.1%_0.063W_10PPM, "Resistor - 0.1%", Case=0603, Manufacturer=GENERIC, Manufacturer1 ComponentHeight=0.5mm, Manufacturer1 Example="TYCO HOLSWORTHY", Manufacturer1 Part Number=RN73C1J66K5BTDF, Power=0.063W, Tolerance=±0.1%, Author="CERN DEM JLC", Component Type=Standard, CreateDate=03/12/2007, HelpURL=\\cern.ch\dfs\Applications\Altium\Datasheets\R0603_Tyco_RN73.pdf, LatestRevisionDate=13/03/2008, Manufacturer Part Number=R0603_66K5_0.1%_0.063W_10PPM, Mounted=Yes, Part Description="Thin Film Chip Resistor", Part Number=R0603_66K5_0.1%_0.063W_10PPM, Pin Count=2, Sense=No, SMD=Yes, Socket=No, Status="Not recommended", TC=±10ppm
R29: library part R0603_1K6_1%_0.1W_100PPM, "Resistor - 1%", Case=0603, Manufacturer=GENERIC, Manufacturer1 ComponentHeight=0.55mm, Manufacturer1 Example="NIC COMPONENT", Manufacturer1 Part Number=NRC06F1601TRF, Power=0.1W, Tolerance=±1%, Author="CERN DEM JLC", Component Type=Standard, CreateDate=03/12/2007, HelpURL=\\cern.ch\dfs\Applications\Altium\Datasheets\R0603_NIC_NRC.pdf, LatestRevisionDate=13/03/2008, Manufacturer Part Number=R0603_1K6_1%_0.1W_100PPM, Mounted=Yes, Part Description="General Purpose Thick Film Chip Resistor", Part Number=R0603_1K6_1%_0.1W_100PPM, Pin Count=2, Sense=No, SMD=Yes, Socket=No, Status=Preferred, TC=±100ppm/°C
R30: library part R0603_140K_0.1%_0.063W_10PPM, "Resistor - 0.1%", Case=0603, Manufacturer=GENERIC, Manufacturer1 ComponentHeight=0.5mm, Manufacturer1 Example="TYCO HOLSWORTHY", Manufacturer1 Part Number=RN73C1J140KBTDF, Power=0.063W, Tolerance=±0.1%, Author="CERN DEM JLC", Component Type=Standard, CreateDate=03/12/2007, HelpURL=\\cern.ch\dfs\Applications\Altium\Datasheets\R0603_Tyco_RN73.pdf, LatestRevisionDate=13/03/2008, Manufacturer Part Number=R0603_140K_0.1%_0.063W_10PPM, Mounted=Yes, Part Description="Thin Film Chip Resistor", Part Number=R0603_140K_0.1%_0.063W_10PPM, Pin Count=2, Sense=No, SMD=Yes, Socket=No, Status="Not recommended", TC=±10ppm
R35 R36: library part R0603_7K68_0.1%_0.063W_10PPM, "Resistor - 0.1%", Case=0603, Manufacturer=GENERIC, Manufacturer1 ComponentHeight=0.5mm, Manufacturer1 Example="TYCO HOLSWORTHY", Manufacturer1 Part Number=RN73C1J7K68BTDF, Power=0.063W, Tolerance=±0.1%, Author="CERN DEM JLC", Component Type=Standard, CreateDate=03/12/2007, HelpURL=\\cern.ch\dfs\Applications\Altium\Datasheets\R0603_Tyco_RN73.pdf, LatestRevisionDate=13/03/2008, Manufacturer Part Number=R0603_7K68_0.1%_0.063W_10PPM, Mounted=Yes, Part Description="Thin Film Chip Resistor", Part Number=R0603_7K68_0.1%_0.063W_10PPM, Pin Count=2, Sense=No, SMD=Yes, Socket=No, Status="Not recommended", TC=±10ppm